# Altium PCB EdisonDecaAnchor_Redesign.PcbDoc (part 1 of 2)
Units mm, origin at the board's own origin, x right, y up, seen from the top; angles counter-clockwise.
Board outline 53.5 x 37.5 mm, 6 copper layers (Top Layer, Ground, Mid-Layer 2, Mid-Layer 3, Power, Bottom Layer), stack 1.141 mm thick; 153 components, 128 nets, 528 pads, 277 vias.
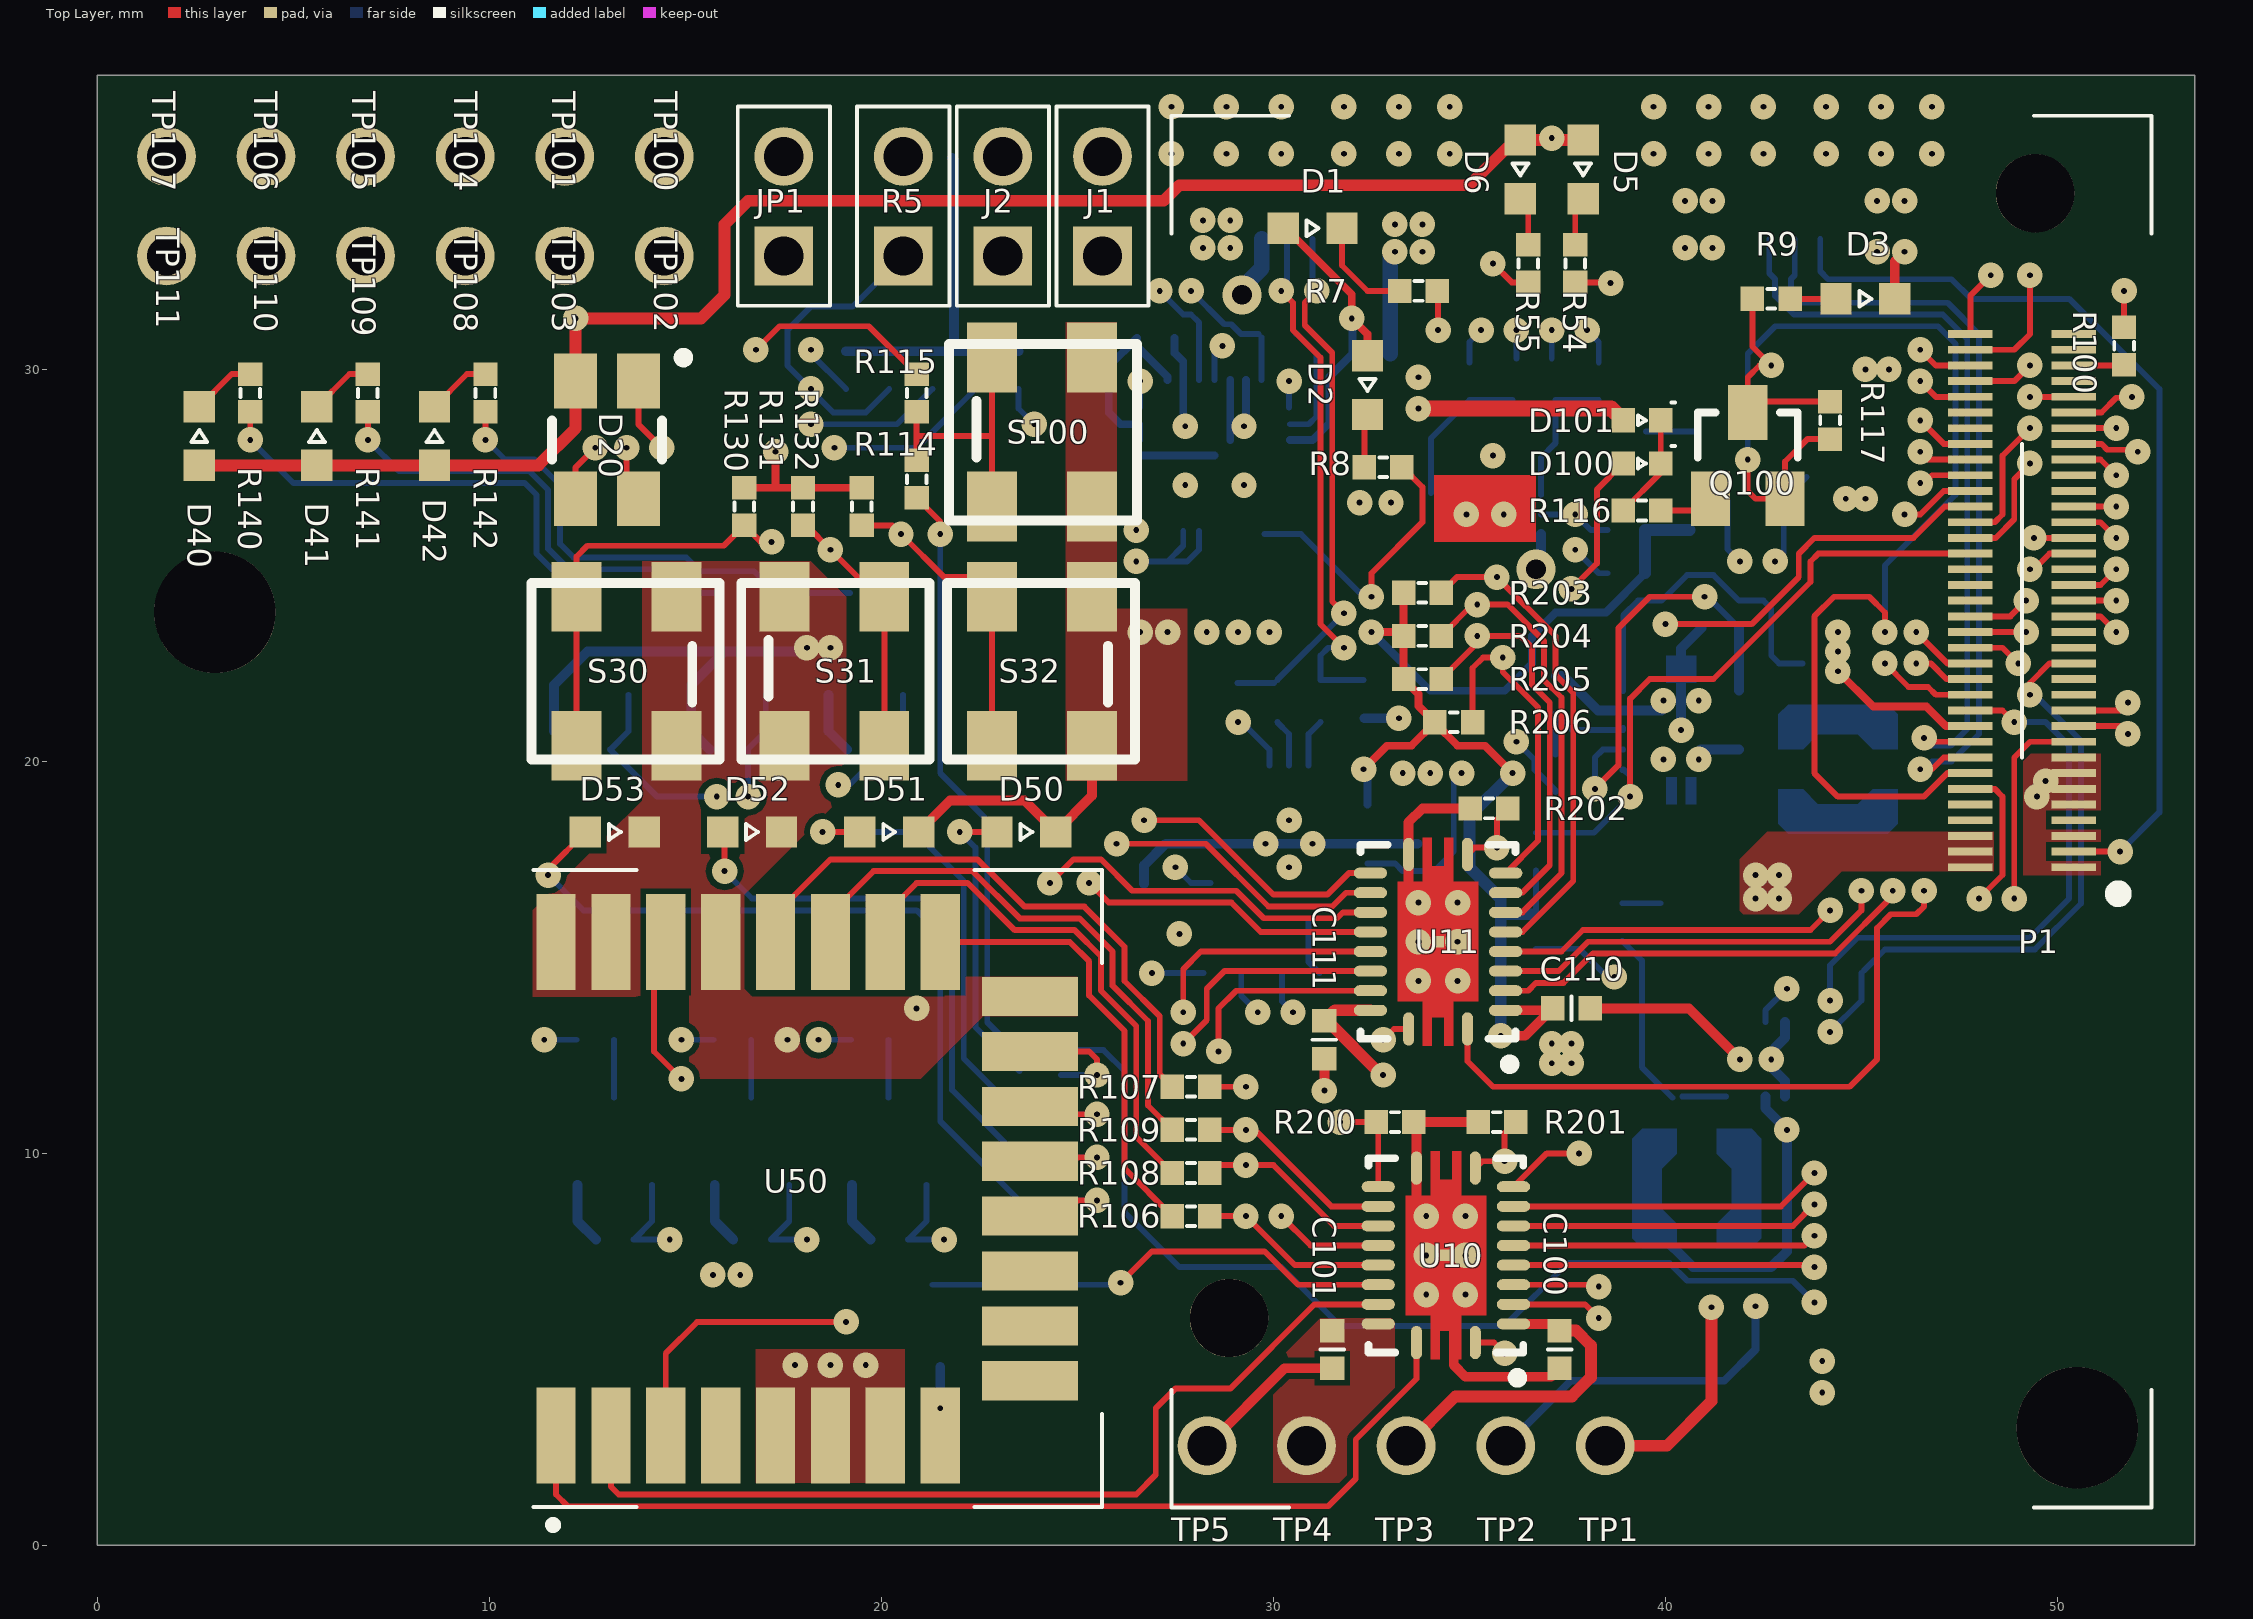
[diagram p0: Top Layer view]
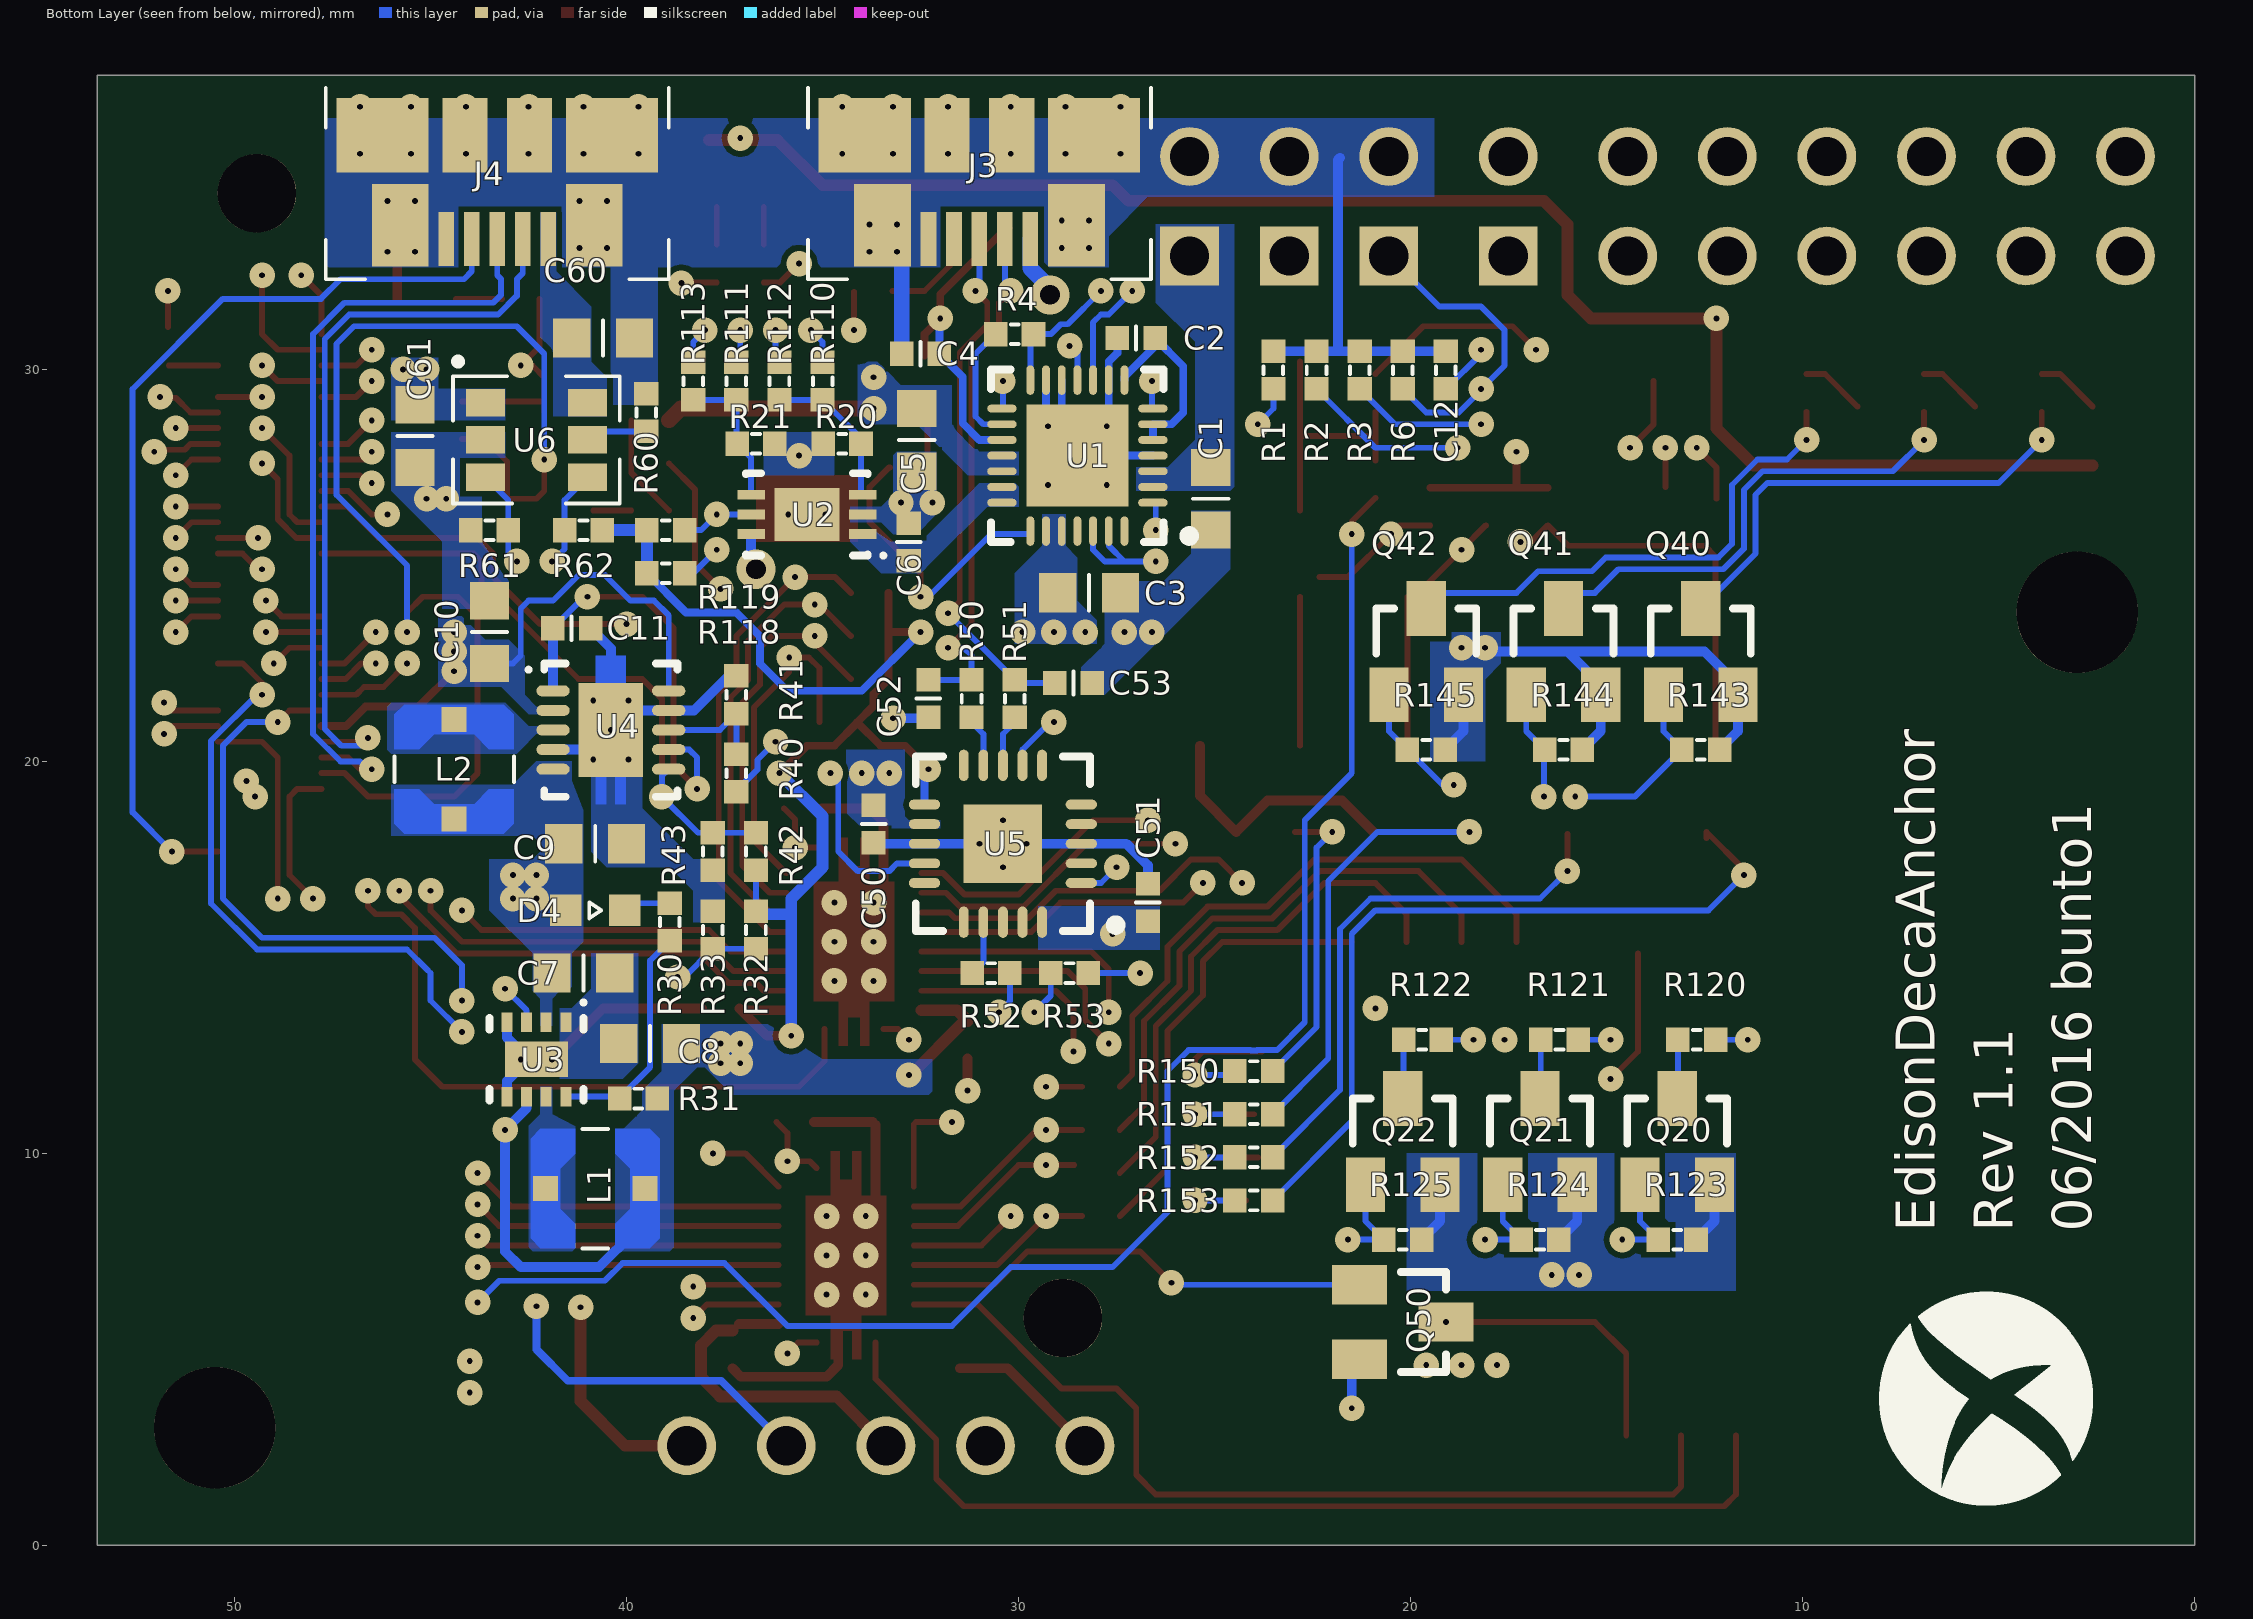
[diagram p1: Bottom Layer view, seen from below]
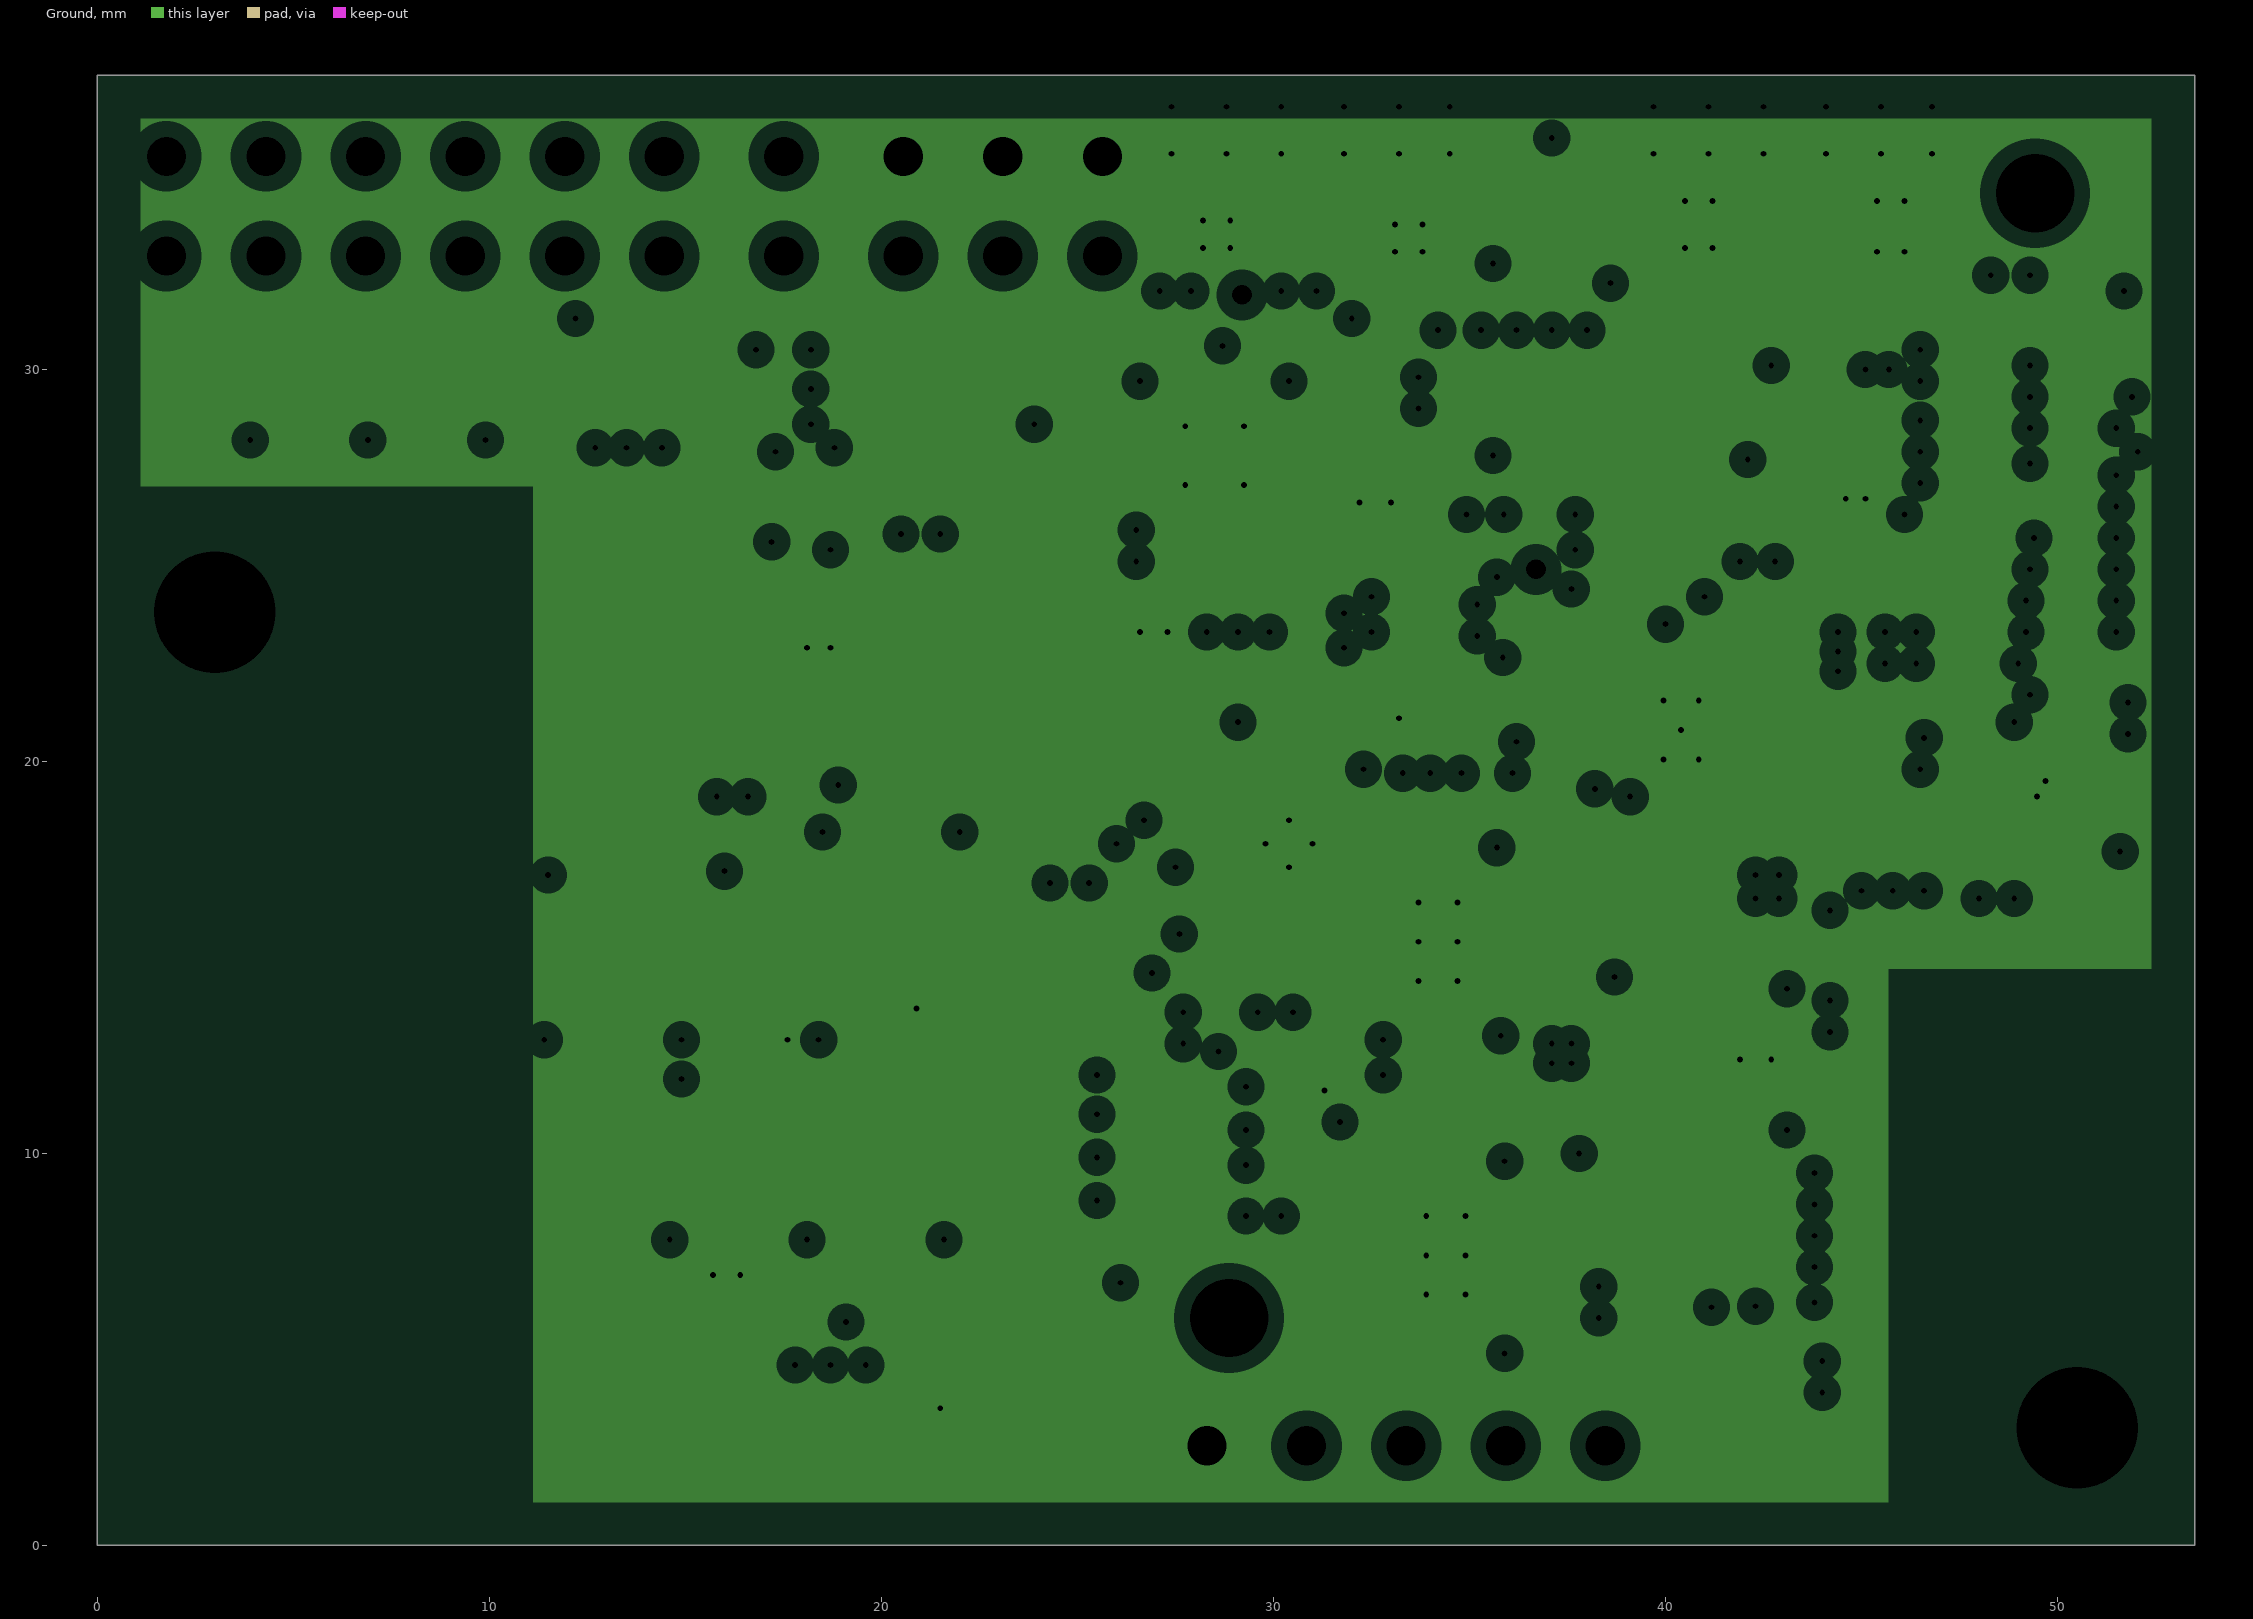
[diagram p2: Ground, clearances drawn from the general rule]
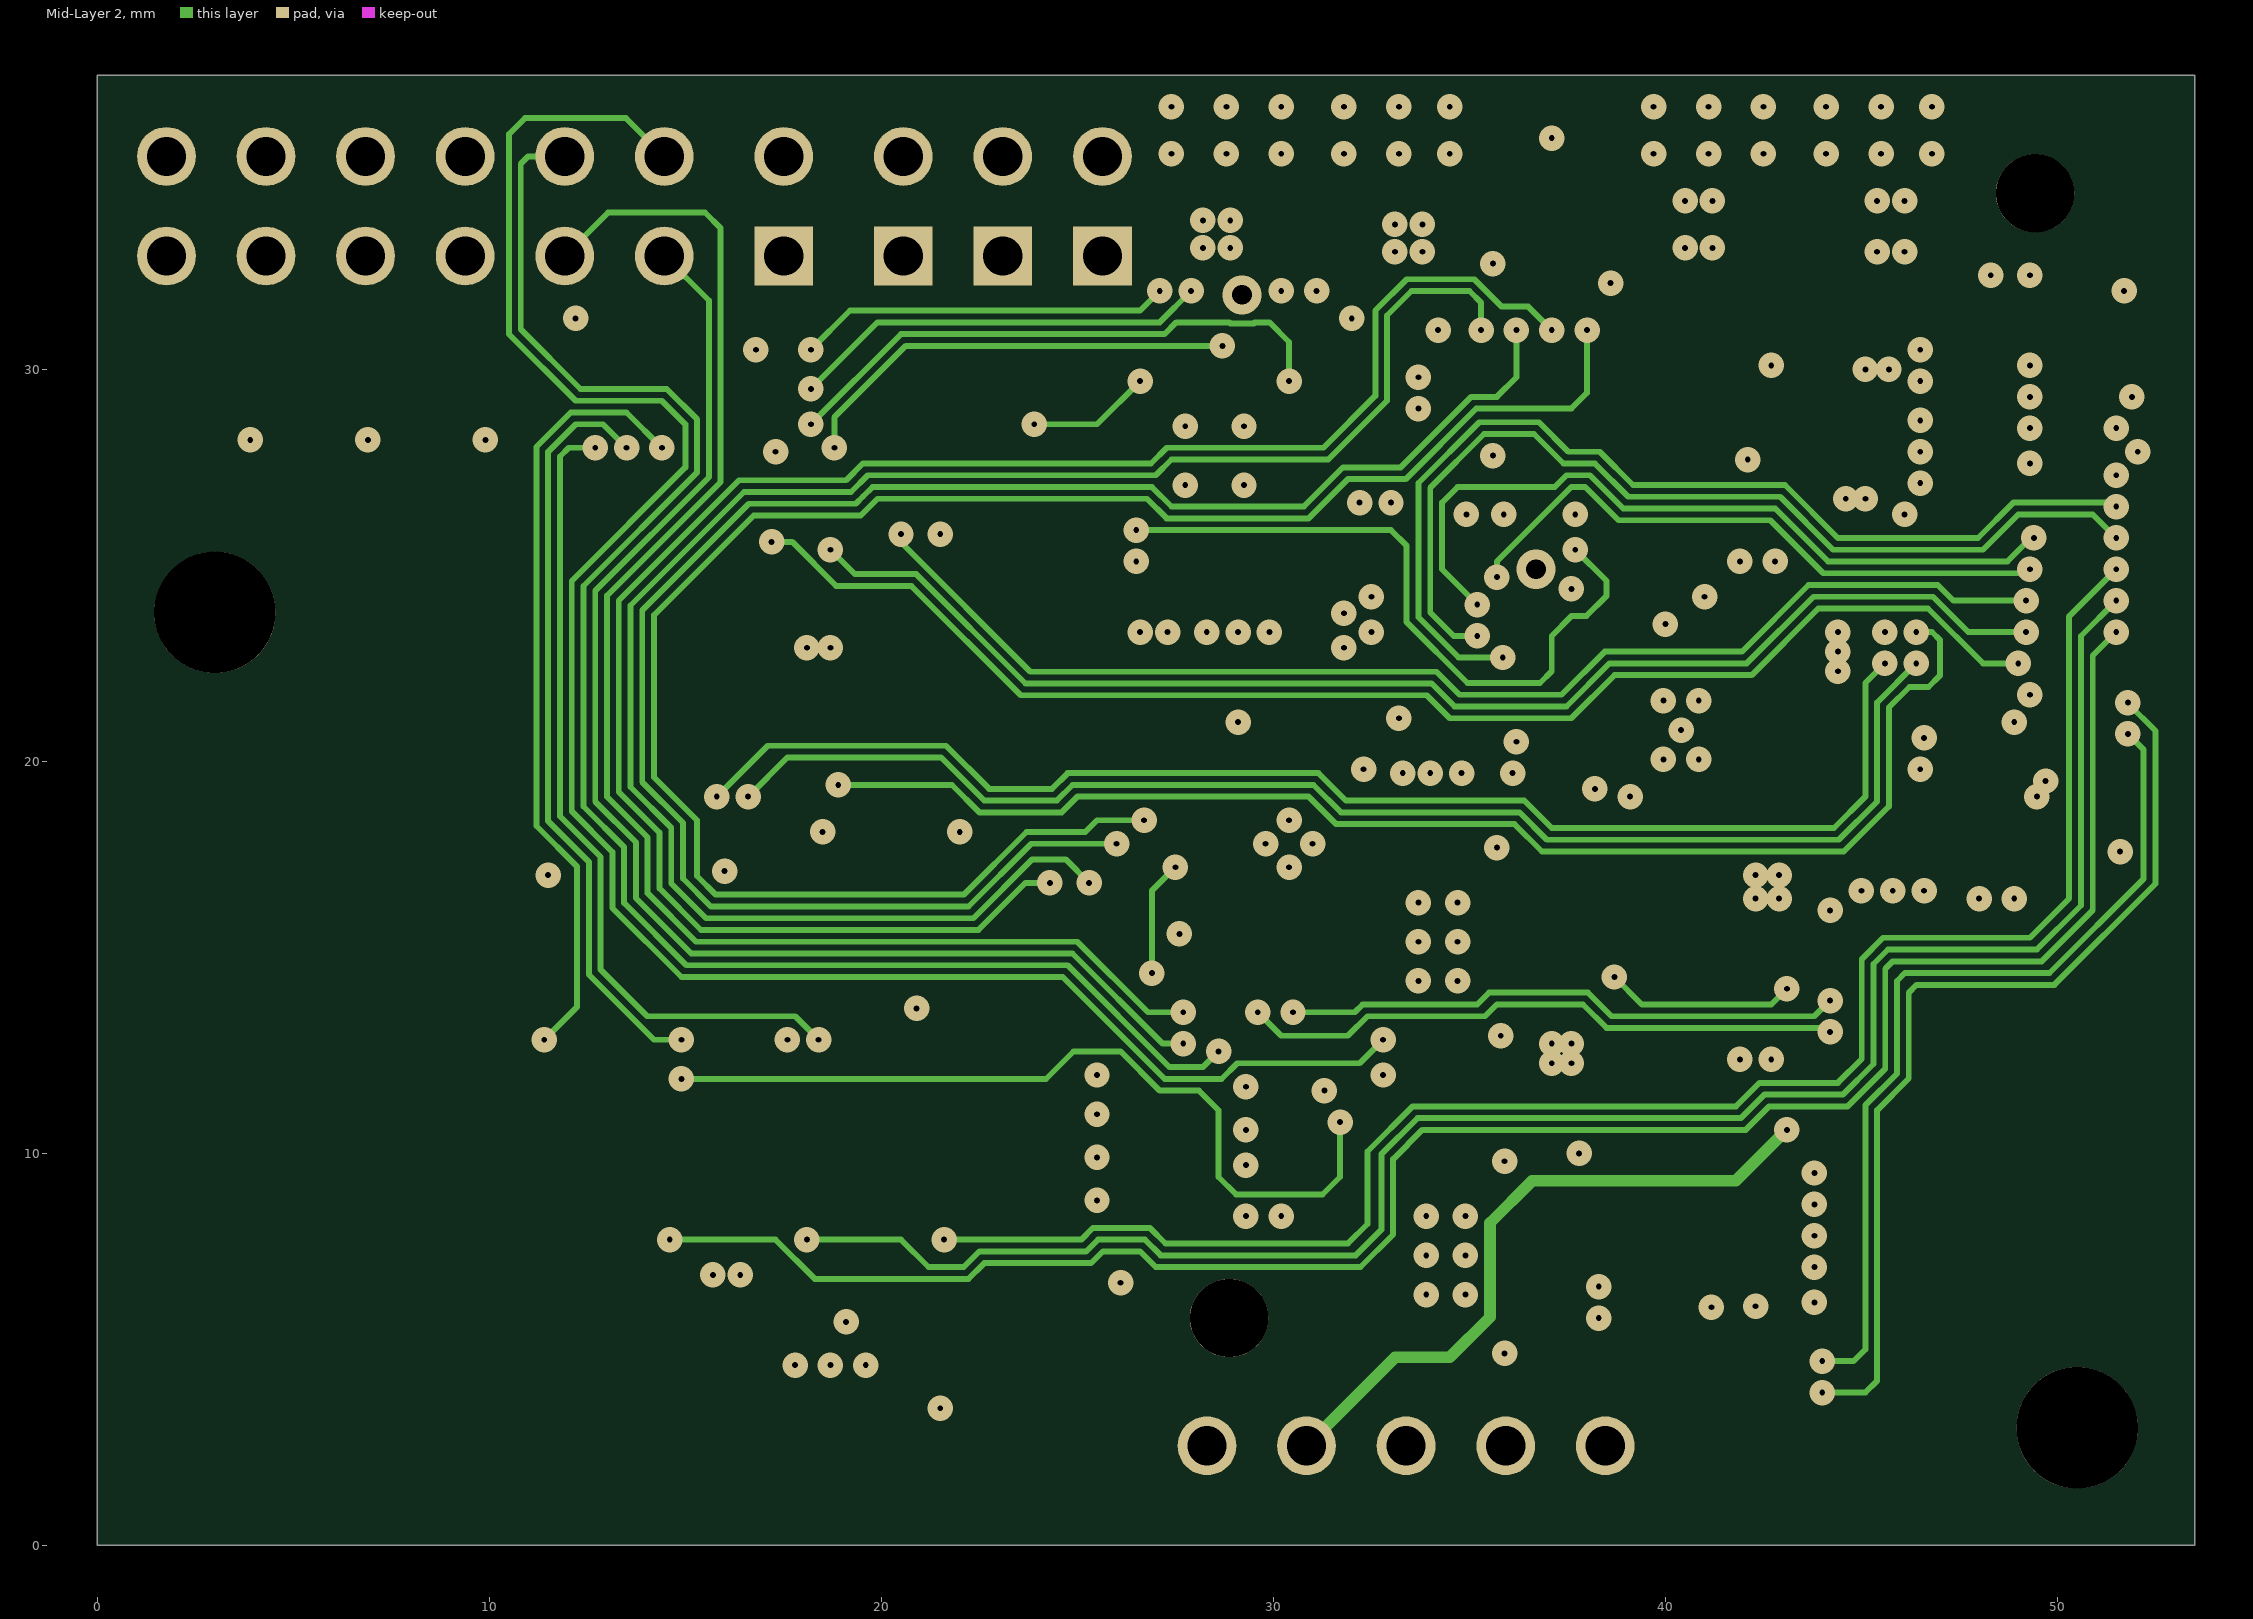
[diagram p3: Mid-Layer 2]
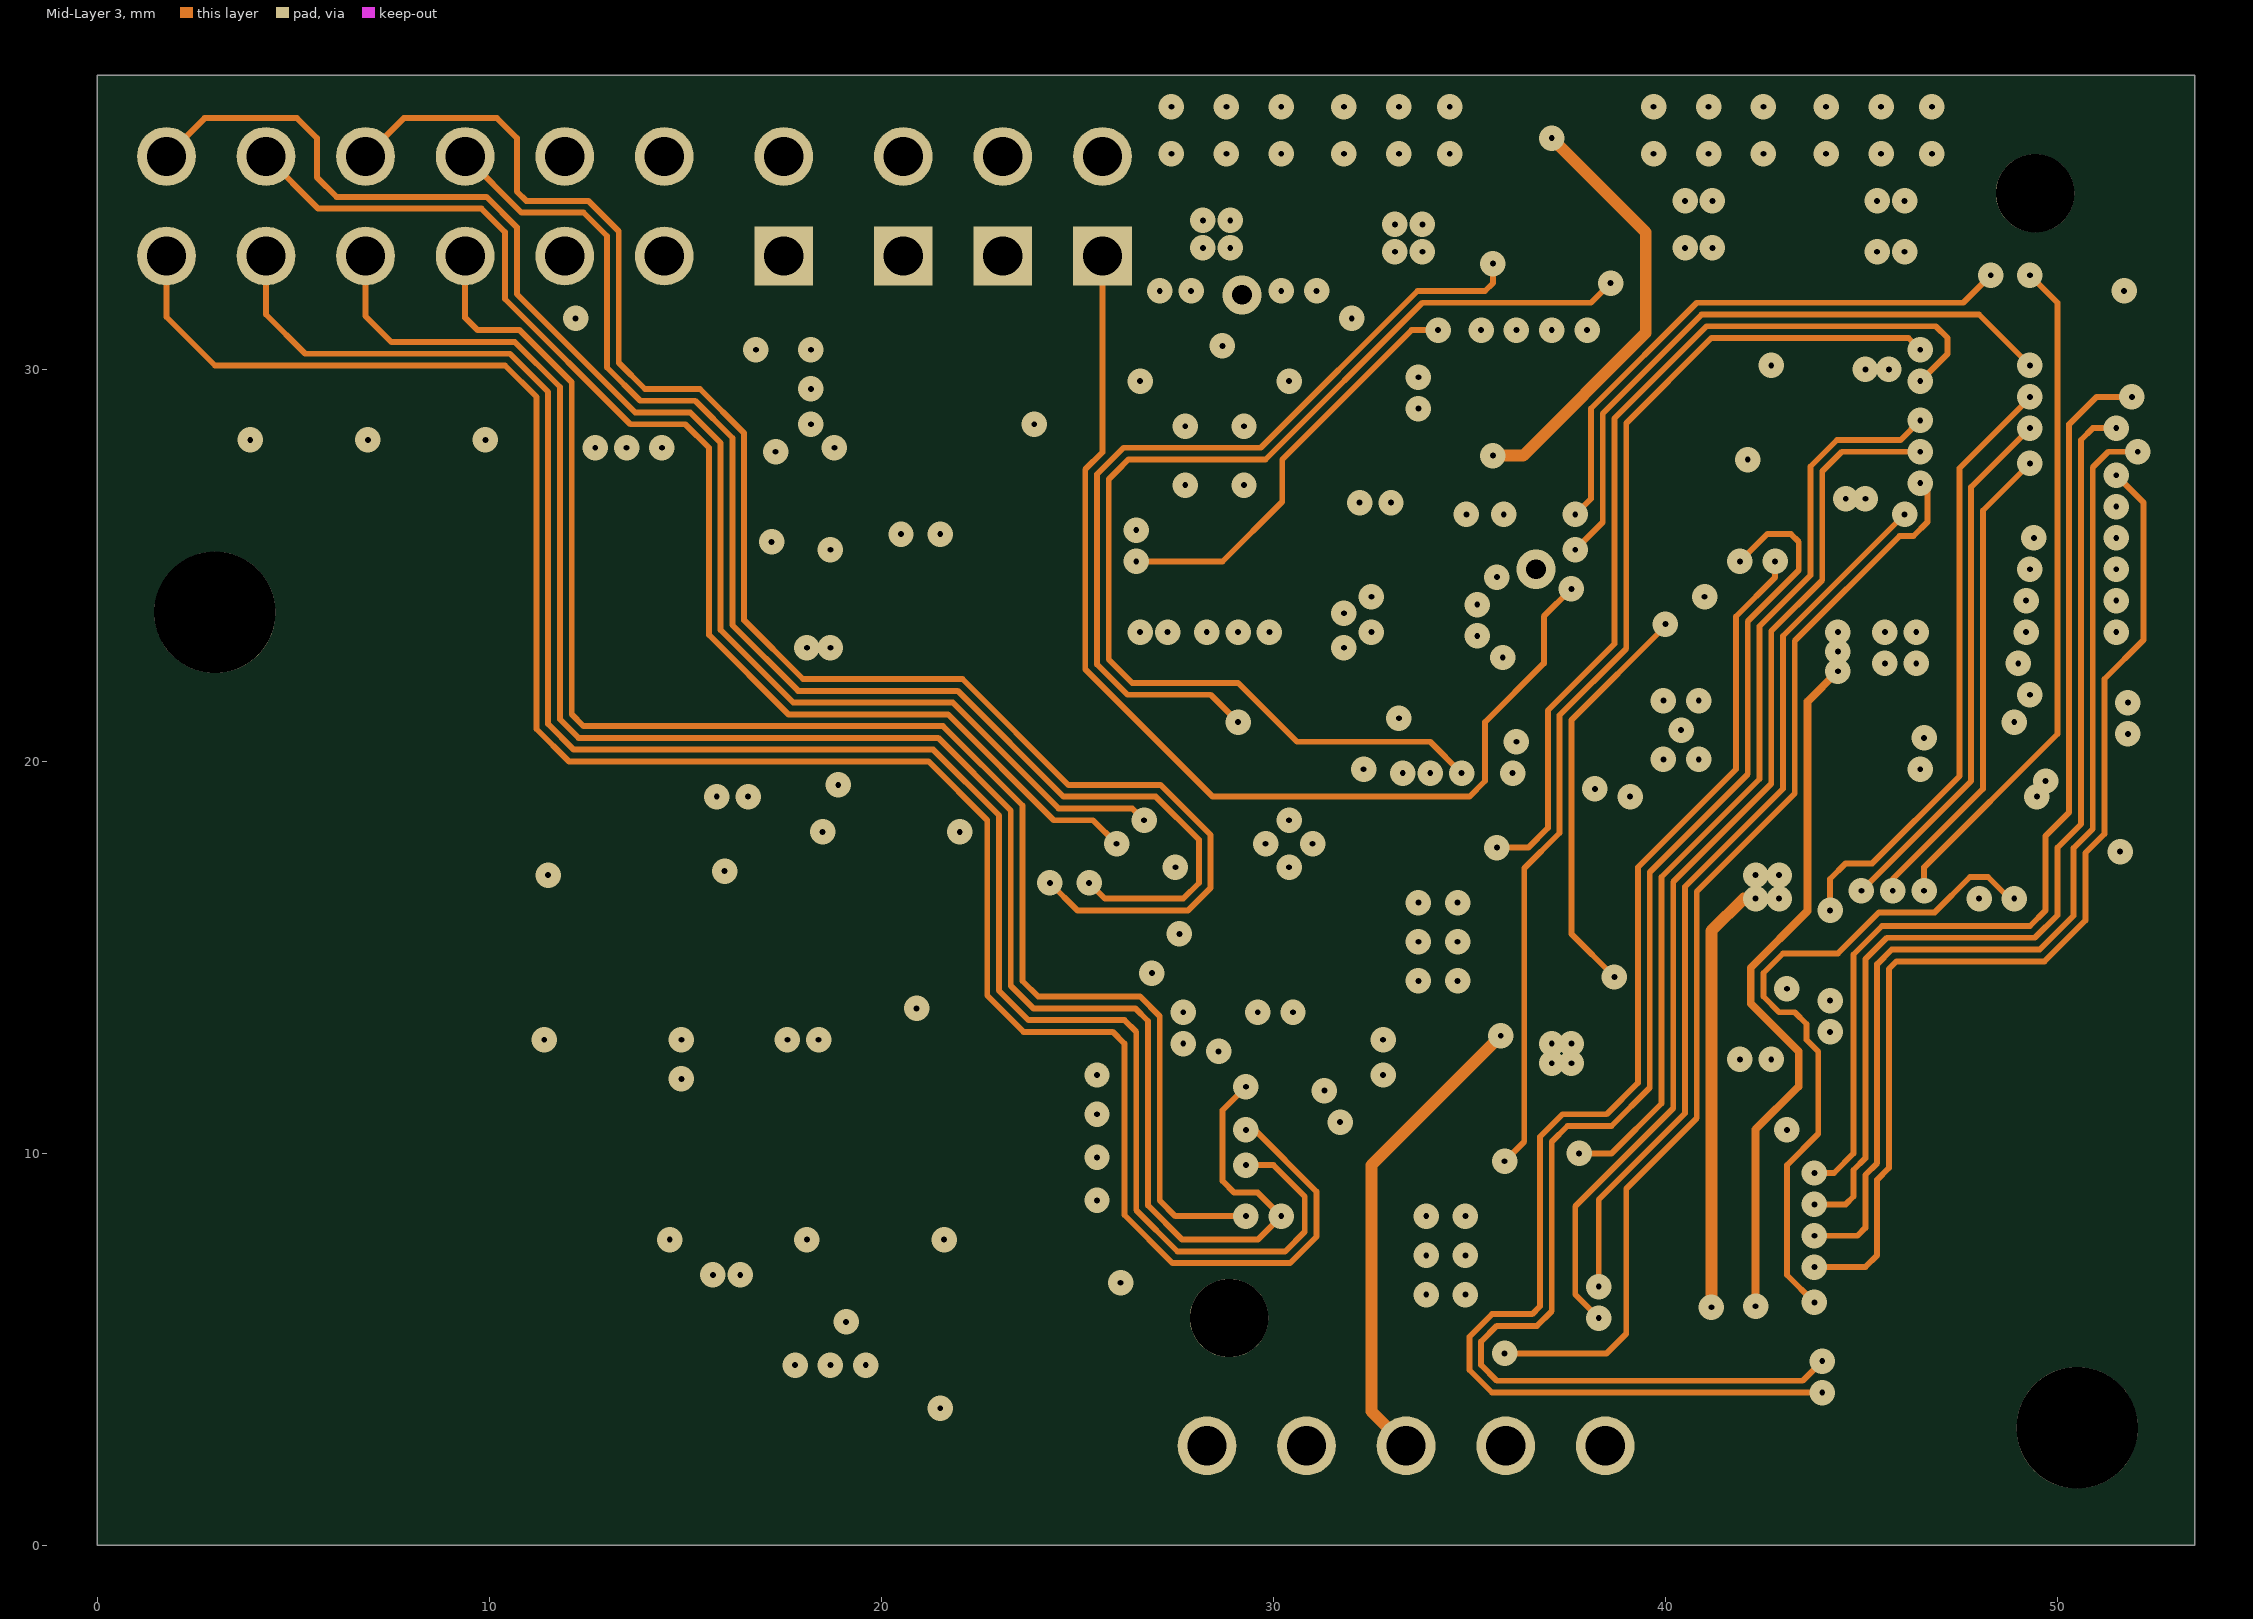
[diagram p4: Mid-Layer 3]
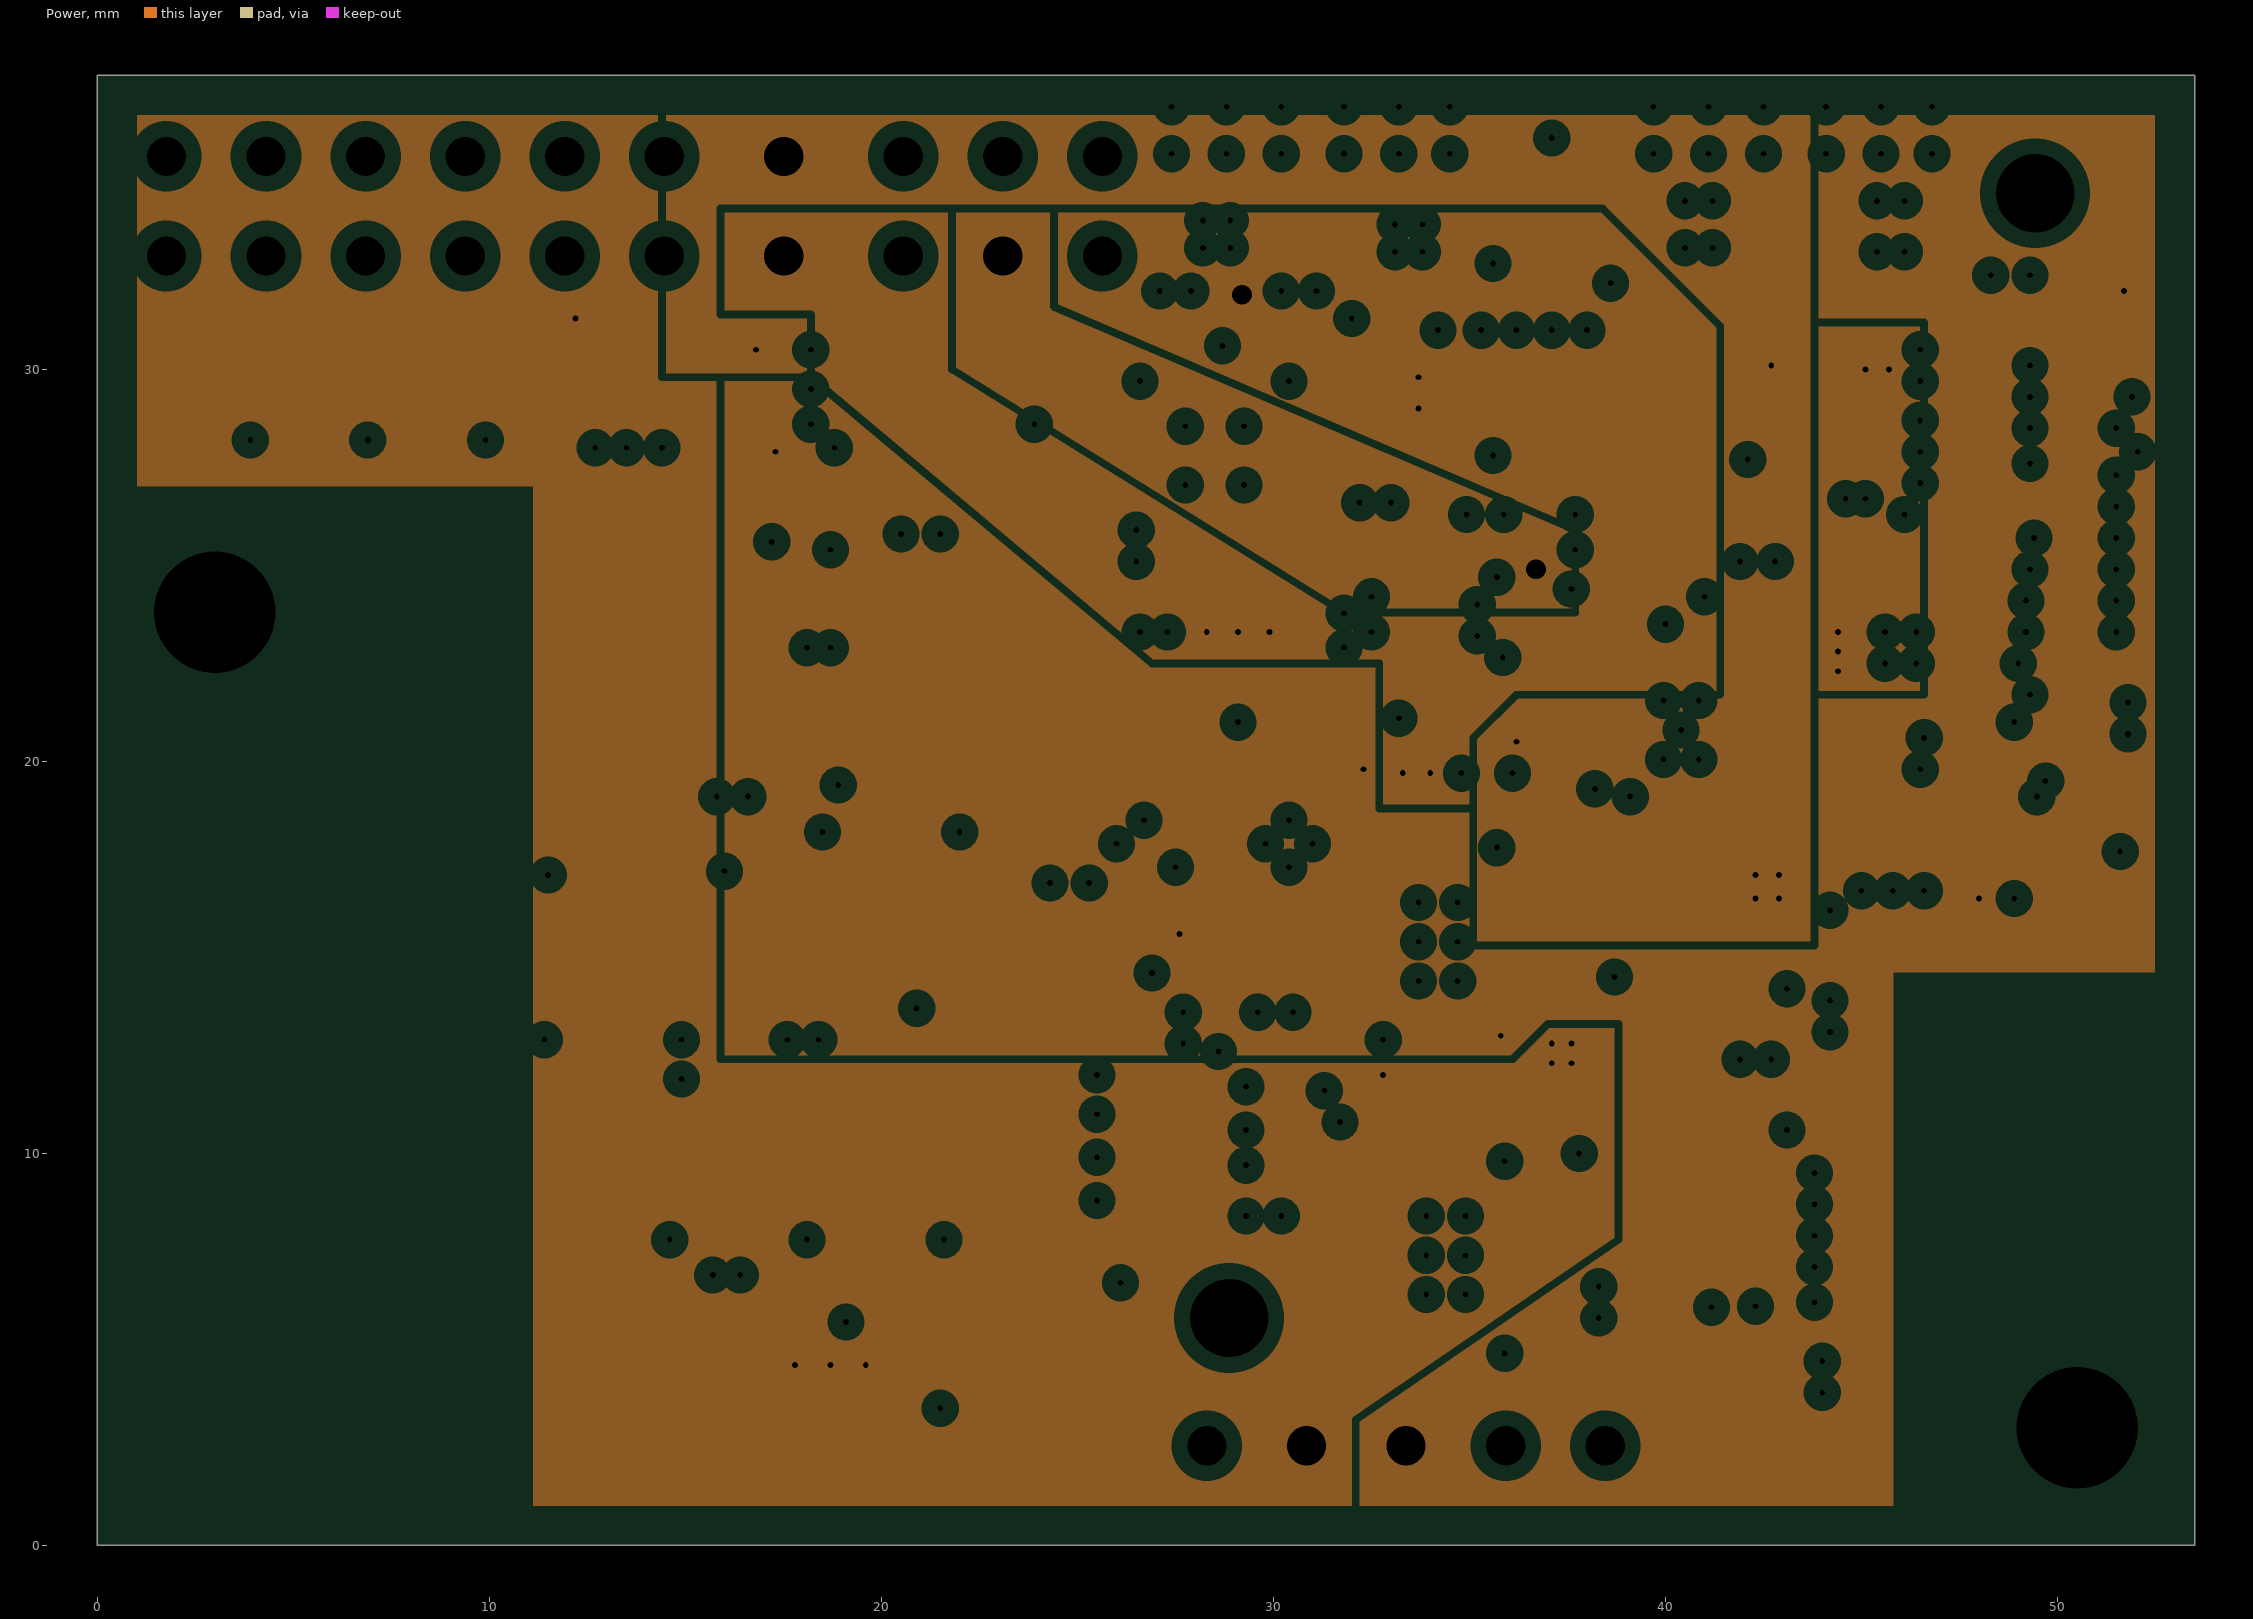
[diagram p5: Power, clearances drawn from the general rule]

## Layer stack, top to bottom
Top Solder: solder mask 0.0102, Solder Resist, Dk 3.5
Top Layer: signal copper 0.018
Dielectric1: prepreg 0.2, FR-4, Dk 4.8
Ground: plane copper 0.036, net GND
Dielectric2: core 0.254, FR-4, Dk 4.2
Mid-Layer 2: signal copper 0.0356
Dielectric3: prepreg 0.127, FR-4, Dk 4.2
Mid-Layer 3: signal copper 0.0356
Dielectric4: core 0.254, FR-4, Dk 4.2
Power: plane copper 0.036, net (Multiple Nets)
Dielectric5: prepreg 0.127, FR-4, Dk 4.2
Bottom Layer: signal copper 0.018
Bottom Solder: solder mask 0.0102, Solder Resist, Dk 3.5

## Board outline
0,0 0,37.5 53.5,37.5 53.5,0

## Design rules (kind name [scope] priority, off if disabled: settings)
AssemblyTestPointUsage [All] p1 off:
Clearance Clearance-xPP-xTP-xTT [All] p1: gap=0.15
ComponentClearance [All] p1: gap=0.25 collisioncheckmode=3 verticalgap=0.25 showdistances=FALSE
DiffPairsRouting [All] p1: maxlimit=0.25 minlimit=0.25 mostfreqgap=0.25 toplayer_minwidth=0.381 toplayer_maxwidth=0.381 toplayer_prefwidth=0.381 midlayer2_minwidth=0.381 midlayer2_maxwidth=0.381 midlayer2_prefwidth=0.381 midlayer3_minwidth=0.381 midlayer3_maxwidth=0.381 midlayer3_prefwidth=0.381 bottomlayer_minwidth=0.381 bottomlayer_maxwidth=0.381 bottomlayer_prefwidth=0.381 maxuncoupledlength=12.5
FabricationTestPointUsage [All] p1 off: valid=0 allowmultiple=FALSE
Height [All] p1: minheight=0 maxheight=25 prefheight=12.5
HoleSize HoleSize-PTH [All] p1: absolutevalues=TRUE maxlimit=2 minlimit=0.15 maxpercent=80.000 minpercent=20.000
HoleToHoleClearance [All] p1: gap=0.15 allowstackedmicrovias=TRUE
MinimumAnnularRing "Minimum IAR  <= 0.45mm" [((ObjectKind = 'Pad') OR (ObjectKind = 'Via')) And (Layer = 'MultiLayer') And (HoleDiameter <= AsMM(0.45))] p1: minimumring=0.25 // minimum inner annular ring for pads <= 0.45mm finished hole size
MinimumAnnularRing "Minimum IAR  > 0.45mm" [((ObjectKind = 'Pad') OR (ObjectKind = 'Via')) And (Layer = 'MultiLayer') And (HoleDiameter > AsMM(0.45))] p2: minimumring=0.25 // minimum inner annular ring for pads > 0.45mm finished hole size
MinimumAnnularRing Minimum-IAR [All] p3: minimumring=0.2
MinimumSolderMaskSliver [All] p1: minsoldermaskwidth=0.06
PlaneClearance PlaneClearance-IPI [All] p1: clearance=0.4
PlaneConnect [All] p1: planeconnectstyle=Direct reliefexpansion=0.4 reliefentries=4 reliefconductorwidth=0.4 reliefairgap=0.2
PolygonConnect PolygonConnect_Power [InNetClass('Power')] p1: connectstyle=Direct reliefconductorwidth=0.254 reliefentries=4 polygonreliefangle="90 Angle" airgapwidth=0.254
PolygonConnect PolygonConnect-xTW [All] p2: connectstyle=Relief reliefconductorwidth=0.2 reliefentries=4 polygonreliefangle="90 Angle" airgapwidth=0.254
RoutingCorners [All] p1: cornerstyle=45-Degree minsetback=2.5 maxsetback=2.5
RoutingVias "RoutingVias <= 0.45mm" [(ObjectKind = 'Via') And (HoleDiameter <= AsMM(0.45))] p1: holewidth=0.2 width=0.6 viastyle="Through Hole" minholewidth=0.15 minwidth=0.55 maxholewidth=0.3 maxwidth=0.7
RoutingVias "RoutingVias > 0.45mm" [(ObjectKind = 'Via') And (HoleDiameter > AsMM(0.45))] p2: holewidth=0.5 width=0.95 viastyle="Through Hole" minholewidth=0.45 minwidth=0.9 maxholewidth=0.9 maxwidth=1.35
SilkToSilkClearance [All] p1 off: silktosilkclearance=0.2
SilkToSolderMaskClearance SilkscreenOverComponentPads [IsPad] p1 off: minsilkscreentomaskgap=0.2 clearancetoexposedcopper=TRUE
SolderMaskExpansion [All] p1: expansion=0.06
Width Width-xTW [All] p1: maxlimit=1.5 minlimit=0.15 preferedwidth=0.2
17 further rules are at their usual default settings.

## Classes and differential pairs
component class AnchorBoard_SNS_Power: C1 C2 C3 C4 C5 C6 C7 C8 C9 C10 C11 C12 C50 C51 C52 C53 C60 C61 D1 D2 D3 D4 D5 D6 J1 J2 J3 J4 JP1 L1 L2 R1 R2 R3 R4 R5 R6 R7 R8 R9 R20 R21 R30 R31 R32 R33 R40 R41 R42 R43 R50 R51 R52 R53 R54 R55 R60 R61 R62 TP1 TP2 TP3 TP4 TP5 U1 U2 U3 U4 U5 U6
component class AnchorBoard_SNS_Edison: C100 C101 C110 C111 D20 D40 D41 D42 D50 D51 D52 D53 D100 D101 P1 Q20 Q21 Q22 Q40 Q41 Q42 Q50 Q100 R100 R106 R107 R108 R109 R110 R111 R112 R113 R114 R115 R116 R117 R118 R119 R120 R121 R122 R123 R124 R125 R130 R131 R132 R140 R141 R142 R143 R144 R145 R150 R151 R152 R153 R200 R201 R202 R203 R204 R205 R206 S30 S31 S32 S100 TP100 TP101 TP102 TP103 TP104 TP105 TP106 TP107 TP108 TP109 TP110 TP111 U10 U11 U50
net class Power: 1V8 3V3 5V GND NetC2_2 NetC3_2 NetC11_2 NetC60_2 NetJ2_1 NetL1_1 NetL2_2 V_BATT V_CHG_USB V_DCIN V_LDO VSYS

## Components (designator, comment, footprint, x,y, rotation, side; value= is the part's Value field where it differs from the comment)
C1 "10uF" CAPC1608X80 25.1,26.7 r90 bottom
C2 "100nF" CAPC1005X50 27,30.8 r180 bottom
C3 "10uF" CAPC1608X80 28.2,24.3 r0 bottom
C4 "1uF" CAPC1005X50 32.5,30.4 r180 bottom
C5 "4.7uF" CAPC1608X80 32.6,28.2 r90 bottom
C6 "100nF" CAPC1005X50 32.8,25.6 r270 bottom
C7 "10uF" CAPC1608X80 41.1,14.6 r0 bottom
C8 "22uF" CAPC1608X80 39.4,12.8 r180 bottom
C9 "10uF" CAPC1608X80 40.8,17.9 r0 bottom
C10 "22uF" CAPC1608X80 43.5,23.3 r270 bottom
C11 "1uF" CAPC1005X50 41.4,23.4 r0 bottom
C12 "NCC" RESC1005X35 19.1,29.98 r270 bottom
C50 "100nF" CAPC1005X50 33.7,18.4 r90 bottom
C51 "100nF" CAPC1005X50 26.7,16.4 r270 bottom
C52 "47pF" CAPC1005X50 32.3,21.6 r90 bottom
C53 "47pF" CAPC1005X50 28.6,22 r0 bottom
C60 "10uF" CAPC1608X80 40.6,30.8 r0 bottom
C61 "10uF" CAPC1608X80 45.4,28.3 r90 bottom
C100 "100nF" CAPC1005X50 37.3,5 r90 top
C101 "100nF" CAPC1005X50 31.5,5 r90 top
C110 "100nF" CAPC1005X50 37.6,13.7 r180 top
C111 "100nF" CAPC1005X50 31.3,12.9 r90 top
D1 "green" LEDM1608X80 31,33.6 r0 top
D2 "red" LEDM1608X80 32.4,29.6 r270 top
D3 "blue" LEDM1608X80 45.1,31.8 r0 top
D4 "red" LEDM1608X80 40.8,16.2 r180 bottom
D5 "yellow" LEDM1608X80 37.9,35.1 r270 top
D6 "orange" LEDM1608X80 36.3,35.1 r270 top
D20 "RGB LED" PLCC160P350X280X190-4 13,28.2 r270 top
D40 "green" LEDM1608X80 2.6,28.3 r90 top
D41 "orange" LEDM1608X80 5.6,28.3 r90 top
D42 "red" LEDM1608X80 8.6,28.3 r90 top
D50 "green" LEDM1608X80 23.7,18.2 r0 top
D51 "red" LEDM1608X80 20.2,18.2 r0 top
D52 "yellow" LEDM1608X80 16.7,18.2 r0 top
D53 "orange" LEDM1608X80 13.2,18.2 r0 top
D100 "DB2G42900L1" DIOC1006X10 39.4,27.6 r180 top
D101 "DB2G42900L1" DIOC1006X10 39.4,28.7 r180 top
J1 "DC In" HDR1X2_V_M 25.638,32.893 r90 top
J2 "Accu" HDR1X2_V_M 23.098,32.893 r90 top
J3 "USB Charge / UART" MOLEX_0473460001 31,36.3 r270 bottom
J4 "Edison USB OTG Port" MOLEX_0473460001 43.3,36.3 r270 bottom
JP1 "JUMPER" HDR1X2_V_M 17.51,32.893 r90 top
L1 "2.2uH" INDM2929X140 40.8,9.1 r180 bottom
L2 "2.2uH" INDM2929X140 44.4,19.8 r90 bottom
P1 "Intel Edison" HDRV70W12P40_2X35_Edison 49.1,24.1 r0 top
Q20 "FDV301N" SOT190P360X120-3 13.2,10.3 r180 bottom
Q21 "FDV301N" SOT190P360X120-3 16.7,10.3 r180 bottom
Q22 "FDV301N" SOT190P360X120-3 20.201,10.299 r180 bottom
Q40 "FDV301N" SOT190P360X120-3 12.6,22.8 r180 bottom
Q41 "FDV301N" SOT190P360X120-3 16.1,22.8 r180 bottom
Q42 "FDV301N" SOT190P360X120-3 19.6,22.8 r180 bottom
Q50 "FDV301N" SOT190P360X120-3 20.2,5.7 r270 bottom
Q100 "FDV301N" SOT190P360X120-3 42.1,27.8 r0 top
R1 "1K5" RESC1005X35 23.5,29.98 r90 bottom
R2 "3K" RESC1005X35 22.4,29.98 r90 bottom
R3 "0R" RESC1005X35 21.3,29.98 r270 bottom
R4 "10K" RESC1005X35 30.1,30.9 r0 bottom
R5 "NTC" HDR1X2_V_M 20.558,32.893 r90 top
R6 "NC" RESC1005X35 20.2,29.98 r90 bottom
R7 "68R" RESC1005X35 33.7,32 r0 top
R8 "82R" RESC1005X35 32.8,27.5 r180 top
R9 "68R" RESC1005X35 42.7,31.8 r0 top
R20 "10K" RESC1005X35 34.5,28.1 r180 bottom
R21 "10K" RESC1005X35 36.7,28.1 r0 bottom
R30 "220R" RESC1005X35 38.9,15.9 r270 bottom
R31 "100K" RESC1005X35 39.7,11.4 r180 bottom
R32 "NC" RESC1005X35 36.7,15.7 r90 bottom
R33 "20K" RESC1005X35 37.8,15.7 r90 bottom
R40 "NC" RESC1005X35 37.2,19.7 r270 bottom
R41 "0R" RESC1005X35 37.2,21.7 r270 bottom
R42 "NC" RESC1005X35 36.7,17.7 r270 bottom
R43 "20K" RESC1005X35 37.8,17.7 r270 bottom
R50 "27R" RESC1005X35 31.2,21.6 r270 bottom
R51 "27R" RESC1005X35 30.1,21.6 r270 bottom
R52 "100R" RESC1005X35 30.7,14.6 r0 bottom
R53 "100R" RESC1005X35 28.7,14.6 r180 bottom
R54 "68R" RESC1005X35 37.7,32.7 r270 top
R55 "68R" RESC1005X35 36.5,32.7 r90 top
R60 "287R" RESC1005X35 39.5,28.9 r90 bottom
R61 "100K" RESC1005X35 43.5,25.9 r0 bottom
R62 "20K" RESC1005X35 41.1,25.9 r0 bottom
R100 "0R" RESC1005X35 51.7,30.6 r90 top
R106 "0R" RESC1005X35 27.9,8.4 r180 top
R107 "0R" RESC1005X35 27.9,11.7 r180 top
R108 "0R" RESC1005X35 27.9,9.5 r180 top
R109 "0R" RESC1005X35 27.9,10.6 r180 top
R110 "0R" RESC1005X35 35,29.7 r270 bottom
R111 "0R" RESC1005X35 37.2,29.7 r270 bottom
R112 "NC" RESC1005X35 36.1,29.7 r270 bottom
R113 "NC" RESC1005X35 38.3,29.7 r270 bottom
R114 "220R" RESC1005X35 20.9,27.2 r90 top
R115 "20K" RESC1005X35 20.9,29.4 r270 top
R116 "1K" RESC1005X35 39.4,26.4 r0 top
R117 "NC" RESC1005X35 44.2,28.7 r90 top
R118 "20K" RESC1005X35 39,24.8 r180 bottom
R119 "20K" RESC1005X35 39,25.9 r180 bottom
R120 "68R" RESC1005X35 12.7,12.9 r180 bottom
R121 "27R" RESC1005X35 16.2,12.9 r180 bottom
R122 "27R" RESC1005X35 19.7,12.9 r180 bottom
R123 "20K" RESC1005X35 13.2,7.8 r180 bottom
R124 "20K" RESC1005X35 16.7,7.8 r180 bottom
R125 "20K" RESC1005X35 20.2,7.8 r180 bottom
R130 "20K" RESC1005X35 16.5,26.5 r270 top
R131 "20K" RESC1005X35 18,26.5 r270 top
R132 "20K" RESC1005X35 19.5,26.5 r270 top
R140 "68R" RESC1005X35 3.9,29.4 r270 top
R141 "68R" RESC1005X35 6.9,29.4 r270 top
R142 "82R" RESC1005X35 9.9,29.4 r270 top
R143 "20K" RESC1005X35 12.6,20.3 r180 bottom
R144 "20K" RESC1005X35 16.1,20.3 r180 bottom
R145 "20K" RESC1005X35 19.6,20.3 r180 bottom
R150 "68R" RESC1005X35 24,12.1 r180 bottom
R151 "82R" RESC1005X35 24,11 r180 bottom
R152 "68R" RESC1005X35 24,9.9 r180 bottom
R153 "68R" RESC1005X35 24,8.8 r180 bottom
R200 "20K" RESC1005X35 33.1,10.8 r0 top
R201 "100K" RESC1005X35 35.7,10.8 r180 top
R202 "100K" RESC1005X35 35.5,18.8 r180 top
R203 "2K" RESC1005X35 33.8,24.3 r0 top
R204 "2K" RESC1005X35 33.8,23.2 r0 top
R205 "2K" RESC1005X35 33.8,22.1 r0 top
R206 "2K" RESC1005X35 34.6,21 r0 top
S30 "SW_SPST_PB" SW_7914J-1-000E 13.5,22.3 r180 top
S31 "SW_SPST_PB" SW_7914J-1-000E 18.8,22.3 r0 top
S32 "SW_SPST_PB" SW_7914J-1-000E 24.1,22.3 r180 top
S100 "SW_SPST_PB" SW_7914J-1-000E 24.1,28.4 r0 top
TP1 "V_SYS" TP_THT 38.465,2.54 r0 top
TP2 "V_5V" TP_THT 35.925,2.54 r90 top
TP3 "V_1V8" TP_THT 33.385,2.54 r90 top
TP4 "V_3V3" TP_THT 30.845,2.54 r90 top
TP5 "GND" TP_THT 28.305,2.54 r90 top
TP100 "GPIO_0" TP_THT 14.462,35.433 r90 top
TP101 "GPIO_1" TP_THT 11.922,35.433 r90 top
TP102 "USART_RX" TP_THT 14.462,32.893 r90 top
TP103 "USART_TX" TP_THT 11.922,32.893 r90 top
TP104 "I2C1_SCL" TP_THT 9.382,35.433 r90 top
TP105 "I2C1_SDA" TP_THT 6.842,35.433 r90 top
TP106 "I2C6_SCL" TP_THT 4.302,35.433 r90 top
TP107 "I2C6_SDA" TP_THT 1.762,35.433 r90 top
TP108 "SPI_CS" TP_THT 9.382,32.893 r90 top
TP109 "SPI_SCK" TP_THT 6.842,32.893 r90 top
TP110 "SPI_MOSI" TP_THT 4.302,32.893 r90 top
TP111 "SPI_MISO" TP_THT 1.762,32.893 r90 top
U1 "MAX8934E" QFN40P40X40X80-29 28.5,27.8 r0 bottom
U2 "LTC2941-1" DFN30X20X80-6 35.4,26.3 r0 bottom
U3 "TPS62162" SON50P210X210X80-9 42.3,12.4 r270 bottom
U4 "TPS61202" SON50P310X310X100-11 40.4,20.8 r180 bottom
U5 "FT231XQ" QFN50P40X40X80-21 30.4,17.9 r0 bottom
U6 "MIC2039EYM6-TR" SOT95P360X130-6 42.3,28.2 r270 bottom
U10 "TXS0108E" QFN50P47X37X100-21 34.4,7.4 r180 top
U11 "TXS0108E" QFN50P47X37X100-21 34.2,15.4 r180 top
U50 "DWM1000" DECAWAVE_DWM1000 12.5,9.1 r90 top

## Footprints (in the part's own frame and the unit in brackets; to place one, negate y for a bottom-side part, rotate by r counter-clockwise, add the part's x,y. Pads: shape width x height; smd on the part's side, far side on the other; paste and mask are expansions set on the pad)
CAPC1005X50 [mm] "Chip Capacitor; 1.0x0.5mm"
  rect 0.6x0.62 smd: 1(-0.48,0) 2(0.48,0)
  silkscreen extent 0,-0.3 0,0.3, body extent -0.5,-0.25 0.5,0.25, height 0.35
CAPC1608X80 [mm] "Chip Capacitor; 1.6x0.8mm"
  rect 0.95x1 smd: 1(-0.8,0) 2(0.8,0)
  silkscreen extent 0,-0.45 0,0.45, body extent -0.8,-0.4 0.8,0.4, height 0.8
DECAWAVE_DWM1000 [mm] "DecaWave DWM1000 module"
  rect 2.45x1 smd: 1(-6.295,0.8) 2(-6.295,-0.6) 3(-6.295,-2) 4(-6.295,-3.4) 5(-6.295,-4.8) 6(-6.295,-6.2) 7(-6.295,-7.6) 8(-6.295,-9) 17(6.295,-9) 18(6.295,-7.6) 19(6.295,-6.2) 20(6.295,-4.8) 21(6.295,-3.4) 22(6.295,-2) 23(6.295,-0.6) 24(6.295,0.8)
  rect 1x2.45 smd: 9(-4.9,-11.295) 10(-3.5,-11.295) 11(-2.1,-11.295) 12(-0.7,-11.295) 13(0.7,-11.295) 14(2.1,-11.295) 15(3.5,-11.295) 16(4.9,-11.295)
  silkscreen extent -8.66,-13.13 8.13,1.38, body extent -6.5,-11.47 6.5,11.53, height 2.9
DFN30X20X80-6 [mm] "LTC2941-1"
  rect 0.7x0.25 smd mask+0.08: 1(-1.425,0.5) 2(-1.425,0) 3(-1.425,-0.5) 4(1.425,-0.5) 5(1.425,0) 6(1.425,0.5)
  rect 1.65x1.35 smd paste-0.2 mask+0.102: 7(0,0)
  silkscreen extent -2,-1.05 1.55,1.1, body extent -1.5,-1 1.5,1, height 0.8
DIOC1006X10 [mm] "Chip Diode 1x0.6mm"
  rect 0.6x0.62 smd: 1(-0.48,0) 2(0.48,0)
  silkscreen extent -0.85,-0.45 0.1,0.13, body extent -0.5,-0.25 0.5,0.25, height 0.35
HDR1X2_V_M [mm] "Connector; Header; 2 Position male"
  rect 1.5x1.5 hole 1: 1(0,0)
  round 1.5 hole 1: 2(2.54,0)
  silkscreen extent -1.27,-1.17 3.81,1.17, body extent -1.3,-1.3 3.8,1.3, height 8.3
HDRV70W12P40_2X35_Edison [mm] "Header for Intel Edison"
  round 2 hole 2 paste+0 mask+0: 0(-20.23,-18.3) 0(0.33,10.39)
  rect 1.14x0.2 smd paste-0.05 mask+0.02: 1(1.32,-6.8) 2(-1.32,-6.8) 3(1.32,-6.4) 4(-1.32,-6.4) 5(1.32,-6) 6(-1.32,-6) 7(1.32,-5.6) 8(-1.32,-5.6) 9(1.32,-5.2) 10(-1.32,-5.2) 11(1.32,-4.8) 12(-1.32,-4.8) 13(1.32,-4.4) 14(-1.32,-4.4) 15(1.32,-4) 16(-1.32,-4) 17(1.32,-3.6) 18(-1.32,-3.6) 19(1.32,-3.2) 20(-1.32,-3.2) 21(1.32,-2.8) 22(-1.32,-2.8) 23(1.32,-2.4) 24(-1.32,-2.4) 25(1.32,-2) 26(-1.32,-2) 27(1.32,-1.6) 28(-1.32,-1.6) 29(1.32,-1.2) 30(-1.32,-1.2) 31(1.32,-0.8) 32(-1.32,-0.8) 33(1.32,-0.4) 34(-1.32,-0.4) 35(1.32,0) 36(-1.32,0) 37(1.32,0.4) 38(-1.32,0.4) 39(1.32,0.8) 40(-1.32,0.8) 41(1.32,1.2) 42(-1.32,1.2) 43(1.32,1.6) 44(-1.32,1.6) 45(1.32,2) 46(-1.32,2) 47(1.32,2.4) 48(-1.32,2.4) 49(1.32,2.8) 50(-1.32,2.8) 51(1.32,3.2) 52(-1.32,3.2) 53(1.32,3.6) 54(-1.32,3.6) 55(1.32,4) 56(-1.32,4) 57(1.32,4.4) 58(-1.32,4.4) 59(1.32,4.8) 60(-1.32,4.8) 61(1.32,5.2) 62(-1.32,5.2) 63(1.32,5.6) 64(-1.32,5.6) 65(1.32,6) 66(-1.32,6) 67(1.32,6.4) 68(-1.32,6.4) 69(1.32,6.8) 70(-1.32,6.8)
  silkscreen extent -21.7,-23.13 3.3,12.37, body extent -21.79,-23.25 3.29,12.31, height 5.51
INDM2929X140 [mm] "coilcraft inductor lps3015"
  rect 0.635x0.635 smd paste+0 mask+0: 1(-1.27,0) 2(1.27,0)
  Top Layer region: 0.508,-1.524 0.508,-0.889 0.889,-0.508 0.889,0.508 0.508,0.889 0.508,1.524 1.397,1.524 1.651,1.27 1.651,-1.27 1.397,-1.524
  Top Layer region: -1.651,-1.27 -1.397,-1.524 -0.508,-1.524 -0.508,-0.889 -0.889,-0.508 -0.889,0.508 -0.508,0.889 -0.508,1.524 -1.397,1.524 -1.651,1.27
  silkscreen extent -0.33,-1.52 0.33,1.52, body extent -1.47,-1.47 1.47,1.47, height 1.4
LEDM1608X80 [mm] "LED; 1.6x0.8mm"
  rect 0.8x0.8 smd: 1(-0.75,0) 2(0.75,0)
  silkscreen extent -0.15,-0.2 0.15,0.2, body extent -0.8,-0.4 0.8,0.4, height 0.5
MOLEX_0473460001 [mm] "Molex USB Micro B"
  rect 1.38x0.4 smd paste-0.08: 1(2.975,1.3) 2(2.975,0.65) 3(2.975,0) 4(2.975,-0.65) 5(2.975,-1.3)
  rect 1.9x2.35 smd: 6(0.325,-2.925) 6(0.325,2.925)
  rect 1.9x1.15 smd: 6(0.325,-0.825) 6(0.325,0.825)
  rect 2.1x1.45 smd: 6(2.625,-2.475) 6(2.625,2.475)
  silkscreen extent -0.87,-4.38 4,4.38, body extent -1.78,-3.99 3.65,3.99, height 2.72
PLCC160P350X280X190-4 [mm]
  rect 1.4x1.1 smd: 1(-1.5,0.8) 2(-1.5,-0.8) 3(1.5,-0.8) 4(1.5,0.8)
  silkscreen extent -2.22,-1.4 0.5,2.08, body extent -1.75,-1.4 1.75,1.4, height 1.9
QFN40P40X40X80-29 [mm] "TQFN28-EP, T2844+1, MAX8934"
  oval 0.75x0.2 smd: 1(-1.925,1.2) 2(-1.925,0.8) 3(-1.925,0.4) 4(-1.925,0) 5(-1.925,-0.4) 6(-1.925,-0.8) 7(-1.925,-1.2) 15(1.925,-1.2) 16(1.925,-0.8) 17(1.925,-0.4) 18(1.925,0) 19(1.925,0.4) 20(1.925,0.8) 21(1.925,1.2)
  oval 0.2x0.75 smd: 8(-1.2,-1.925) 9(-0.8,-1.925) 10(-0.4,-1.925) 11(0,-1.925) 12(0.4,-1.925) 13(0.8,-1.925) 14(1.2,-1.925) 22(1.2,1.925) 23(0.8,1.925) 24(0.4,1.925) 25(0,1.925) 26(-0.4,1.925) 27(-0.8,1.925) 28(-1.2,1.925)
  rect 2.6x2.6 smd paste-0.4: 29(0,0)
  silkscreen extent -2.97,-2.2 2.2,2.2, body extent -2.05,-2.05 2.05,2.05, height 0.8
QFN50P40X40X80-21 [mm] "FT231XQ"
  oval 0.8x0.25 smd: 1(-2,1) 2(-2,0.5) 3(-2,0) 4(-2,-0.5) 5(-2,-1) 11(2,-1) 12(2,-0.5) 13(2,0) 14(2,0.5) 15(2,1)
  oval 0.25x0.8 smd: 6(-1,-2) 7(-0.5,-2) 8(0,-2) 9(0.5,-2) 10(1,-2) 16(1,2) 17(0.5,2) 18(0,2) 19(-0.5,2) 20(-1,2)
  rect 2x2 smd paste-1: 21(0,0)
  silkscreen extent -3,-2.22 2.23,2.23, body extent -2.07,-2.07 2.08,2.08, height 0.8
QFN50P47X37X100-21 [mm] "VQFN, TXB0108RGYR"
  oval 0.28x0.85 smd paste-0.025 mask+0.07: 1(-0.75,2.225) 10(-0.75,-2.225) 11(0.75,-2.225) 20(0.75,2.225)
  oval 0.85x0.28 smd paste-0.025 mask+0.07: 2(-1.725,1.75) 3(-1.725,1.25) 4(-1.725,0.75) 5(-1.725,0.25) 6(-1.725,-0.25) 7(-1.725,-0.75) 8(-1.725,-1.25) 9(-1.725,-1.75) 12(1.725,-1.75) 13(1.725,-1.25) 14(1.725,-0.75) 15(1.725,-0.25) 16(1.725,0.25) 17(1.725,0.75) 18(1.725,1.25) 19(1.725,1.75)
  rect 0.3x0.3 smd paste-0.15 mask+0: 21(0,0)
  Top Layer region: 0.16,2.65 0.16,1.925 -0.16,1.925 -0.16,2.65 -0.39,2.65 -0.39,1.525 -1.025,1.525 -1.025,-1.525 -0.39,-1.525 -0.39,-2.65 -0.16,-2.65 -0.16,-1.925 0.16,-1.925 0.16,-2.65 0.39,-2.65 0.39,-1.525 1.025,-1.525 1.025,1.525 0.39,1.525 0.39,2.65
  silkscreen extent -1.97,-2.48 1.98,3.25, body extent -1.82,-2.33 1.83,2.32, height 1
RESC1005X35 [mm] "Chip Resistor; 1x0.5mm"
  rect 0.6x0.62 smd: 1(-0.48,0) 2(0.48,0)
  silkscreen extent -0.1,-0.25 0.1,0.25, body extent -0.5,-0.25 0.5,0.25, height 0.35
SON50P210X210X80-9 [mm] "WSON8TP, TPS62162"
  rect 0.5x0.28 smd paste-0.14 mask+0.07: 1(-0.95,0.75) 2(-0.95,0.25) 3(-0.95,-0.25) 4(-0.95,-0.75) 5(0.95,-0.75) 6(0.95,-0.25) 7(0.95,0.25) 8(0.95,0.75)
  rect 0.9x1.6 smd paste-0.45 mask+0.07: 9(0,0)
  silkscreen extent -1.5,-1.2 1.05,1.25, body extent -1.05,-1.05 1.05,1.05, height 0.8
SON50P310X310X100-11 [mm] "VSON10, TPS61202"
  oval 0.85x0.28 smd paste-0.025 mask+0.07: 1(-1.475,1) 2(-1.475,0.5) 3(-1.475,0) 4(-1.475,-0.5) 5(-1.475,-1) 6(1.475,-1) 7(1.475,-0.5) 8(1.475,0) 9(1.475,0.5) 10(1.475,1)
  rect 1.65x2.4 smd paste-0.825 mask+0.07: 11(0,0)
  Top Layer region: -0.39,1.9 -0.11,1.9 -0.11,1.2 -0.39,1.2
  Top Layer region: 0.39,1.2 0.11,1.2 0.11,1.9 0.39,1.9
  Top Layer region: 0.39,-1.9 0.11,-1.9 0.11,-1.2 0.39,-1.2
  Top Layer region: -0.39,-1.2 -0.11,-1.2 -0.11,-1.9 -0.39,-1.9
  silkscreen extent -2.15,-1.7 1.7,1.7, body extent -1.55,-1.55 1.55,1.55, height 1
SOT95P360X130-6 [mm] "3 Pin"
  rect 0.7x1 smd: 1(-0.95,-1.3) 2(0,-1.3) 3(0.95,-1.3) 4(0.95,1.3) 5(0,1.3) 6(-0.95,1.3)
  silkscreen extent -2.05,-2.12 1.63,2.12, body extent -1.46,-1.42 1.46,1.42, height 1.1
SOT190P360X120-3 [mm] "3 Pin"
  rect 1x1.4 smd: 1(-0.95,-1.1) 2(0.95,-1.1) 3(0,1.1)
  silkscreen extent -1.28,-0.05 1.28,1.1, body extent -1.5,-1.25 1.5,1.25, height 1.1
SW_7914J-1-000E [mm] "BOURNS 7914J-001-000"
  rect 1.27x1.78 smd: 1(-1.275,1.9) 1(-1.275,-1.9) 2(1.275,1.9) 2(1.275,-1.9)
  silkscreen extent -2.37,-2.25 2.43,2.25, body extent -2.5,-2.5 2.5,2.5, height 4
TP_THT [mm] "TestPoint, suitable for soldering"
  round 1.5 hole 1: 1(0,0)

## Part data
C1 C3 C5 C7 C9 C12 C60 C61: library part Capacitor, "Capacitor SMD Ceramic X7R"
C2 C6 C50 C51 C52 C53 C100 C101 C110 C111: library part Capacitor, "Capacitor SMD"
C4 C8 C10 C11: library part Capacitor, "Capacitor SMD Ceramic X7R Low ESR"
D1 D40 D50: library part LED_green, "Light Emitting Diode"
D2 D4 D42 D51: library part LED_red, "Light Emitting Diode"
D3: library part LED_blue, "Light Emitting Diode"
D5 D52: library part LED_yellow, "Light Emitting Diode"
D6 D41 D53: library part LED_orange, "Light Emitting Diode"
D20: library part LED_RGB_CA, "RGB LED with common Anode"
D100 D101: library part D_SCHOTTKY, "Schottky Diode"
J1 R5: library part PORT_THT, "2-Pin THT Port"
J2: library part ACCU_PORT, "Accu Port"
J3 J4: library part USB_micro_B, "USB Connectors MICRO USB B RECPT"
JP1: "Jumper"
L1 L2: library part L, "Inductor"
P1: library part "Intel Edison Header", "Intel Edison Header, 70-Pin Dual row"
Q20 Q21 Q22 Q40 Q41 Q42 Q50 Q100: "N-Channel MOSFET"
R1 R2 R3 R4 R6 R7 R8 R9 R20 R21 R30 R31 R32 R33 R40 R41 R42 R43 R50 R51 R52 R53 R54 R55 R60 R61 R62 R100 R106 R107 R108 R109 R110 R111 R112 R113 R114 R115 R116 R117 R118 R119 R120 R121 R122 R123 R124 R125 R130 R131 R132 R140 R141 R142 R143 R144 R145 R150 R151 R152 R153 R200 R201 R202 R203 R204 R205 R206: library part Resistor, "Resistor"
S30 S31 S32 S100: "Switch PB"
TP1 TP2 TP3 TP4 TP5 TP100 TP101 TP102 TP103 TP104 TP105 TP106 TP107 TP108 TP109 TP110 TP111: library part TP1, "Test-Point"
U1: "IC BATTERY CHARGER DUAL 28TQFN"
U2: "IC FUEL/GAS GAUGE LI-ION 1A 6DFN"
U3: "IC REG BUCK 3.3V 1A SYNC 8WSON"
U4: "IC REG BOOST 5V 1.2A SYNC 10SON"
U5: "IC USB SERIAL FULL UART 20QFN"
U6: library part MIC2039, "Adjustable Current Limit Power Switch"
U10 U11: library part TXS0108ERGYR, "8-Bit Bidirectional Voltage-Level Translator"
U50: "MOD IEEE802.15.4-2011 UWB TXRX"

## Free pads (board coordinates)
  round 3.1 hole 3.1 paste+0 mask+0: 0(3,23.8) 0(50.5,3)

## Via types
v1: diameter 0.65, hole 0.15, Top Layer to Bottom Layer, 274 vias
v2: diameter 1, hole 0.5, Top Layer to Bottom Layer, 2 vias
v3: diameter 0.65, hole 0.15, Top Layer to Bottom Layer, tented bottom, 1 vias

## Nets (pads, with @x,y where several pads share a name; then routed paths per layer and width w, separated by ;. In a path a pad name is that pad's centre, name@x,y a point inside that pad or via, vN(x,y) a via of type N, cw(c..) or ccw(c..) an arc to the next point about the centre after c; other vN are vias at no path point)
1V8: C51.2 C100.2 C110.2 P1.12 R32.2 R42.2 R62.1 R100.2 R118.1 R119.1 R130.1 R131.1 R132.1 R203.1 R204.1 R205.1 R206.1 TP3.1 U5.11 U5.20 U10.2 U11.2 | length 62.8
  Top Layer w0.15: P1.12@47.78,19.3 48.4,19.3 48.6,19.1 48.6,17.1 v1(48,16.5) ; R100.2@51.7,31.08 v1(51.7,32)
  Top Layer w0.2: R130.1@16.5,26.98 17.3,26.98 ; v1(17.3,27.9) 17.3,26.98 ; R132.1@19.5,26.98 R131.1@18,26.98 17.3,26.98 ; v1(32.3,19.8) 32.9,20.4 33.52,20.4 R206.1@34.12,21 34.12,20.98 34.7,20.4 35.4,20.4 v1(36.1,19.7) ; v1(32.5,23.3) R204.1@33.22,23.3 ; R203.1@33.32,24.3 R204.1@33.32,23.2 R205.1@33.32,22.1 33.32,22.096 33.7,21.716 33.7,21.413 R206.1@34.113,21
  Top Layer w0.25: v1(35.8,13) 36.42,13 C110.2@37.07,13.65 ; U11.2@35.925,13.65 C110.2@37.07,13.65 ; U10.2@36.125,5.65 C100.2@37.13,5.65 ; C110.2@37.12,13.7 C110.2@37.07,13.65
  Top Layer w0.3: TP3.1@33.385,2.54 34.645,3.8 37.614,3.8 38.1,4.286 38.1,5.1 37.72,5.48 C100.2@37.3,5.48
  Mid-Layer 3 w0.3: TP3.1@33.385,2.54 32.5,3.425 32.5,9.7 v1(35.8,13)
  Bottom Layer w0.15: R32.2@36.7,16.18 R42.2@36.7,17.22
  Bottom Layer w0.2: v1(32.3,19.8) 32.4,19.7 U5.11@32.4,18.9 ; v1(32.5,23.3) 34,21.8 35.9,21.8 36.6,22.5 36.6,23.2 37.2,23.8 38.484,23.8 39.48,24.796 R118.1@39.48,24.8
  Bottom Layer w0.3: v1(35.8,13) 35.8,16.1 ; v1(36.1,19.7) 35,18.6 35,17.3 35.8,16.5 35.8,16.1 ; R32.2@36.62,16.1 35.8,16.1 ; R118.1@39.48,24.8 R119.1@39.48,25.9 ; R119.1@39.5,25.9 R119.1@39.48,25.9 ; R62.1@40.62,25.9 R119.1@39.48,25.9
  other v1: 27.6,15.6
3V3: C8.2 C101.2 C111.2 D5.1 D6.1 D20.2 D40.1 D41.1 D42.1 L1.2 R20.1 R21.1 R31.2 TP4.1 U3.6 U10.19 U11.19 U50.5 U50.6 U50.7 | length 81
  Top Layer w0.3: D40.1@2.6,27.55 D41.1@5.6,27.55 D42.1@8.6,27.55 11.25,27.55 12.2,28.5 D20.2@12.2,29.7 v1(12.2,31.3) 15.4,31.3 16,31.9 16,33.7 16.6,34.3 27.2,34.3 27.6,34.7 35,34.7 36.15,35.85 D6.1@36.3,35.85 D5.1@37.9,35.85 ; U11.19@32.475,13.65 31.57,13.65 C111.2@31.3,13.38 31.374,13.38 32.754,12 v1(32.8,12)
  Mid-Layer 2 w0.3: TP4.1@30.845,2.54 33.105,4.8 34.5,4.8 35.525,5.825 35.525,8.225 36.6,9.3 41.8,9.3 v1(43.1,10.6)
  Mid-Layer 3 w0.3: v1(35.6,27.8) 36.37,27.8 39.5,30.93 39.5,33.5 v1(37.1,35.9)
  Bottom Layer w0.25: 39.8,8 40.7,7.1 42.7,7.1 43.1,7.5 v1(43.1,10.6) 42.55,11.15 U3.6@42.55,11.45
  other v1: 17.8,4.6 18.7,4.6 19.6,4.6 37.1,12.3 37.6,12.3 37.1,12.8 37.6,12.8
5V: C10.2 C61.2 P1.20 TP2.1 U4.2 U4.10 U6.1 | length 39.1
  Top Layer w0.2: v1(44.4,22.3) 45.3,21.4 46.656,21.4 47.156,20.9 P1.20@47.78,20.9
  Mid-Layer 3 w0.2: v1(42.3,6.1) 42.3,10.613 43.387,11.7 43.4,11.7 43.4,12.6 42.175,13.825 42.175,14.735 43.625,16.185 43.625,21.525 v1(44.4,22.3)
  Bottom Layer w0.15: U4.10@38.925,21.8 38.925,23.725 39.3,24.1 39.9,24.1 40.55,24.75 41.228,24.75 41.878,24.1 42.5,24.1 42.7,23.9 42.7,22.7 42.9,22.5 C10.2@43.5,22.5
  Bottom Layer w0.2: TP2.1@35.925,2.54 37.585,4.2 41.5,4.2 42.3,5 v1(42.3,6.1)
  other v1: 44.4,22.8 44.4,23.3 45.1,30 45.7,30
CHG_DONE: P1.64 R118.2 U1.1 | length 37.3
  Top Layer w0.15: P1.64@47.78,29.7 48.9,29.7 v1(49.3,30.1)
  Mid-Layer 2 w0.15: v1(26.5,25.9) 28.3,25.9 33,25.9 33.4,25.5 33.4,23.551 34.951,22 36.8,22 37.1,22.3 37.1,23.2 37.612,23.712 37.988,23.712 38.5,24.224 38.5,24.6 v1(37.7,25.4)
  Mid-Layer 3 w0.15: v1(37.7,25.4) 38.4,26.1 38.4,28.876 40.924,31.4 48,31.4 v1(49.3,30.1)
  Bottom Layer w0.15: v1(26.5,25.9) U1.1@26.5,26.525 ; v1(37.7,25.4) 38.3,24.8 R118.2@38.52,24.8
DCIN: P1.14 Q100.2 R117.1 | length 31.9
  Top Layer w0.15: v1(42.1,27.7) 42.1,26.9 42.3,26.7 Q100.2@43.05,26.7 43.05,27.65 43.62,28.22 R117.1@44.2,28.22 ; v1(45.6,23.3) 45.6,23.8 45.2,24.2 44.3,24.2 43.8,23.7 43.8,19.7 44.4,19.1 46.592,19.1 47.192,19.7 P1.14@47.78,19.7
  Bottom Layer w0.15: v1(42.1,27.7) 42.1,30.4 42.8,31.1 46.951,31.1 47.4,30.651 47.4,26.8 45.6,25 v1(45.6,23.3)
DECA_EXTON: P1.52 U10.1 | length 30.7
  Top Layer w0.15: U10.1@35.15,5.175 35.625,5.175 v1(35.9,4.9) ; v1(46.5,27.1) 46.6,27.1 46.8,27.3 46.9,27.3 P1.52@47.78,27.3
  Mid-Layer 3 w0.15: v1(35.9,4.9) 38.5,4.9 39,5.4 39,9.1 40.8,10.9 40.8,16.679 43.3,19.179 43.3,23.076 45.974,25.75 46.328,25.75 46.689,26.111 46.689,26.911 v1(46.5,27.1)
DECA_IRQ: P1.56 U10.9 | length 27.3
  Top Layer w0.15: U10.9@36.125,9.15 36.975,10 v1(37.8,10) ; v1(46.5,28.7) 47.1,28.1 P1.56@47.78,28.1
  Mid-Layer 3 w0.15: v1(37.8,10) 38.627,10 39.9,11.273 39.9,17.051 42.4,19.551 42.4,23.449 43.7,24.749 43.7,27.524 44.376,28.2 46,28.2 v1(46.5,28.7)
DECA_RSTN: P1.50 U10.4 | length 27.1
  Top Layer w0.15: U10.4@36.125,6.65 38.25,6.65 v1(38.3,6.6) ; v1(46.1,26.3) 46.5,26.3 47.1,26.9 P1.50@47.78,26.9
  Mid-Layer 3 w0.15: v1(38.3,6.6) 38.3,8.824 40.5,11.024 40.5,16.803 43,19.303 43,23.2 v1(46.1,26.3)
DECA_WU: P1.54 U10.3 | length 30.8
  Top Layer w0.15: U10.3@36.125,6.15 37.95,6.15 v1(38.3,5.8) ; v1(46.5,27.9) 46.7,27.7 P1.54@47.78,27.7
  Mid-Layer 3 w0.15: v1(38.3,5.8) 37.7,6.4 37.7,8.649 40.2,11.149 40.2,16.927 42.7,19.427 42.7,23.324 44,24.624 44,27.4 44.5,27.9 v1(46.5,27.9)
DWM_EXTON: U10.20 U50.1 | length 26.4
  Top Layer w0.15: U50.1@11.7,2.805 11.7,1.3 12,1 31.4,1 32.1,1.7 32.1,2.7 33.65,4.25 33.65,4.95 U10.20@33.65,5.175
DWM_IRQ: R200.1 U10.12 U50.22 | length 27.2
  Top Layer w0.15: U50.22@14.2,15.095 14.2,12.6 v1(14.9,11.9) ; v1(31.7,10.8) R200.1@32.62,10.8 ; U10.12@32.675,9.15 R200.1@32.675,10.745
  Mid-Layer 2 w0.15: v1(14.9,11.9) 24.2,11.9 24.9,12.6 26.103,12.6 27.103,11.6 28.1,11.6 28.6,11.1 28.6,9.4 29.05,8.95 31.25,8.95 31.7,9.4 v1(31.7,10.8)
DWM_RSTN: Q50.1 U10.17 | length 12.1
  Top Layer w0.15: v1(26.1,6.7) 26.9,7.5 29.776,7.5 30.626,6.65 U10.17@32.675,6.65
  Bottom Layer w0.15: Q50.1@21.3,6.65 26.05,6.65 v1(26.1,6.7)
DWM_WAKEUP: U10.18 U50.2 | length 24
  Top Layer w0.15: U50.2@13.1,2.805 13.1,1.5 13.3,1.3 26.5,1.3 27,1.8 27,3.5 27.5,4 28.9,4 31.05,6.15 U10.18@32.675,6.15
ENA3V3: P1.48 R32.1 R33.1 U3.3 | length 28.1
  Top Layer w0.15: v1(40,23.5) 42.2,23.5 43.4,24.7 43.4,25.3 43.8,25.7 46.324,25.7 47.124,26.5 P1.48@47.78,26.5
  Mid-Layer 2 w0.15: v1(38.7,14.5) 39.4,13.8 42.7,13.8 v1(43.1,14.2)
  Mid-Layer 3 w0.15: v1(38.7,14.5) 37.6,15.6 37.6,21.051 40,23.451 v1(40,23.5)
  Bottom Layer w0.15: R32.1@36.7,15.22 R33.1@37.8,15.22 38.52,14.5 v1(38.7,14.5) ; U3.3@42.55,13.35 42.55,13.65 v1(43.1,14.2)
ENA5V: P1.42 R42.1 R43.1 U4.6 | length 16.6
  Top Layer w0.15: v1(39.1,19.1) 39.1,21.6 39.6,22.1 41.224,22.1 43.7,24.576 43.7,25.1 43.9,25.3 P1.42@47.78,25.3
  Bottom Layer w0.15: R42.1@36.7,18.18 R43.1@37.8,18.18 38.18,18.18 v1(39.1,19.1) 39.1,19.625 U4.6@38.925,19.8 U4.6@38.9,19.775
GAUGE_AL_CC: P1.70 R119.2 U2.5 | length 18.1
  Top Layer w0.15: P1.70@47.78,30.9 47.78,31.88 v1(48.3,32.4)
  Mid-Layer 3 w0.15: v1(37.7,26.3) 38.1,26.7 38.1,29 40.8,31.7 47.6,31.7 v1(48.3,32.4)
  Bottom Layer w0.15: U2.5@36.825,26.3 v1(37.7,26.3) 38.1,25.9 R119.2@38.52,25.9
GND: C1.1 C2.1 C3.1 C4.1 C5.1 C6.1 C7.1 C8.1 C9.1 C10.1 C11.1 C12.1 C50.1 C51.1 C52.1 C53.1 C60.1 C61.1 C100.1 C101.1 C110.1 C111.1 D3.2 D50.2 D51.2 D52.2 D53.2 J1.2 J2.2 J3.5 J3.6 J4.5 J4.6 P1.1 P1.5 P1.9 P1.11 P1.13 P1.15 Q20.2 Q21.2 Q22.2 Q40.2 Q41.2 Q42.2 Q50.2 R1.2 R2.2 R3.1 R5.2 R6.2 R33.2 R41.1 R43.2 R60.2 R61.2 R123.2 R124.2 R125.2 R143.2 R144.2 R145.2 R200.2 R201.2 R202.2 S30.1 S31.1 S32.1 S100.2 TP5.1 U1.4 U1.9 U1.12 U1.13 U1.29 U2.2 U3.1 U3.4 U3.5 U3.9 U4.4 U4.9 U4.11 U5.3 U5.13 U5.21 U6.2 U10.11 U10.21 U11.11 U11.21 U50.8 U50.16 U50.21 U50.23 U50.24 | length 84.7
  Top Layer w0.25: D51.2@20.95,18.2 21.75,19 23.65,19 D50.2@24.45,18.2 25.375,19.125 S32.1@25.375,20.4 ; TP5.1@28.305,2.54 30.285,4.52 C101.1@31.5,4.52 ; v1(31.3,11.6) C111.1@31.3,12.42 ; 33.45,16.15 U11.11@33.45,17.625 33.45,18.45 33.8,18.8 R202.2@35.02,18.8 ; v1@33.65,8.4 U10.11@33.65,9.625 R200.2@33.65,10.73 ; R200.2@33.72,10.8 R201.2@35.22,10.8 ; 34.6,5.7 34.6,4.6 34.9,4.3 37.08,4.3 C100.1@37.3,4.52 ; C110.1@38.08,13.7 40.6,13.7 v1(41.9,12.4) ; D3.2@45.85,31.8 45.85,32.75 v1(46.1,33)
  Bottom Layer w0.2: U1.4@26.575,27.8 U1.29@28.5,27.8 ; C2.1@27.48,30.8 27.48,30.42 27.7,30.2 U1.9@27.7,29.725 U1.29@27.7,28.6 ; U1.29@28.9,28.2 U1.12@28.9,29.725 ; U1.29@29.3,28.6 U1.13@29.3,29.725
  Bottom Layer w0.25: R143.2@12.12,20.3 11.65,20.77 Q40.2@11.65,21.7 11.65,21.95 12.5,22.8 16,22.8 ; Q20.2@12.25,9.2 12.25,8.27 R123.2@12.72,7.8 ; R144.2@15.62,20.3 15.15,20.77 Q41.2@15.15,21.7 15.15,21.95 16,22.8 ; Q21.2@15.75,9.2 15.75,8.27 R124.2@16.22,7.8 ; v1(18.1,22.9) 18,22.8 16,22.8 ; Q42.2@18.65,21.7 18.65,20.77 R145.2@19.12,20.3 ; C12.1@19.1,30.46 R6.2@20.2,30.46 R3.1@21.3,30.46 21.85,30.46 ; Q22.2@19.251,9.199 19.251,8.269 R125.2@19.72,7.8 ; v1(21.5,3.5) Q50.2@21.5,4.55 ; 21.8,35.4 21.85,35.35 21.85,30.46 ; R1.2@23.5,30.46 R2.2@22.4,30.46 21.85,30.46 ; C51.1@26.7,16.88 26.7,17.349 27.251,17.9 U5.3@28.4,17.9 U5.21@30.4,17.9 U5.13@32.4,17.9 C50.1@33.68,17.9 ; C52.1@32.32,21.1 v1(33.2,21.1) ; R41.1@37.2,22.18 37.4,22.18 38.28,21.3 U4.9@38.925,21.3 U4.11@39.9,21.3 ; v1(40.4,20.8) 40.4,22.88 C11.1@40.92,23.4 ; U4.11@40.9,20.3 U4.4@41.875,20.3 ; U3.5@43.05,11.45 43.05,11.85 42.5,12.4 43.05,12.95 U3.4@43.05,13.35
  Bottom Layer w0.4: C4.1@32.98,30.4 J3.6@32.98,32.88
  other v1: 33.9,6.4 34.9,6.4 15.7,6.9 16.4,6.9 33.9,7.4 34.9,7.4 33.9,8.4 34.9,8.4 42.7,12.4 17.6,12.9 20.9,13.7 33.7,14.4 34.7,14.4 33.7,15.4 34.7,15.4 33.7,16.4 34.7,16.4 30.4,17.3 29.8,17.9 31,17.9 30.4,18.5 49.475,19.1 49.7,19.5 39.95,20.05 40.85,20.05 39.95,21.55 40.85,21.55 18.7,22.9 26.6,23.3 27.3,23.3 32.2,26.6 33,26.6 44.6,26.7 45.1,26.7 27.75,27.05 29.25,27.05 27.75,28.55 29.25,28.55 33.1,33 33.8,33 45.4,33 28.2,33.1 28.9,33.1 40.5,33.1 41.2,33.1 33.1,33.7 33.8,33.7 28.2,33.8 28.9,33.8 40.5,34.3 41.2,34.3 45.4,34.3 46.1,34.3 27.4,35.5 28.8,35.5 30.2,35.5 31.8,35.5 33.2,35.5 34.5,35.5 39.7,35.5 41.1,35.5 42.5,35.5 44.1,35.5 45.5,35.5 46.8,35.5 27.4,36.7 28.8,36.7 30.2,36.7 31.8,36.7 33.2,36.7 34.5,36.7 39.7,36.7 41.1,36.7 42.5,36.7 44.1,36.7 45.5,36.7 46.8,36.7
GPIO83: P1.68 U11.1 | length 37.6
  Top Layer w0.15: U11.1@34.95,13.175 34.95,12.35 35.6,11.7 44.7,11.7 45.4,12.4 45.4,15.751 45.749,16.1 46.4,16.1 46.6,16.3 v1(46.6,16.7) ; P1.68@47.78,30.5 48.9,30.5 49.3,30.9 v1(49.3,32.4)
  Mid-Layer 3 w0.15: v1(46.6,16.7) 46.6,17.3 50,20.7 50,31.7 v1(49.3,32.4)
GPIO84: P1.44 U11.3 | length 26.3
  Top Layer w0.15: U11.3@35.925,14.15 36.5,14.15 36.7,14.35 37.399,14.35 38.149,15.1 44.324,15.1 45.8,16.576 v1(45.8,16.7) ; P1.44@47.78,25.7 48.424,25.7 48.9,26.176 48.9,27.2 v1(49.3,27.6)
  Mid-Layer 3 w0.15: v1(45.8,16.7) 45.8,17 48.1,19.3 48.1,26.4 v1(49.3,27.6)
I2C1_SCL: P1.41 R203.2 U11.6 | length 29.6
  Top Layer w0.15: R203.2@34.28,24.3 34.68,24.7 v1(35.7,24.7) 37.2,23.2 37.2,22.202 37.65,21.752 37.65,16.95 36.35,15.65 U11.6@35.925,15.65 ; v1(49.3,24.9) 49.4,24.9 49.8,25.3 P1.41@50.42,25.3
  Mid-Layer 2 w0.15: v1(35.7,24.7) 35.7,25.1 37.6,27 37.951,27 38.801,26.15 42.677,26.15 44.027,24.8 49.2,24.8 v1(49.3,24.9)
  Mid-Layer 3 w0.15: v1@49.2,24.8 v1(49.3,24.9)
I2C1_SDA: P1.43 R204.2 U11.7 | length 31.9
  Top Layer w0.15: R204.2@34.28,23.2 35.08,24 v1(35.2,24) 35.976,24 36.9,23.076 36.9,22.078 37.35,21.628 37.35,17.15 36.35,16.15 U11.7@35.925,16.15 ; v1(49.4,25.7) P1.43@50.42,25.7
  Mid-Layer 2 w0.15: v1(35.2,24) 34.3,24.9 34.3,26.6 34.7,27 37.176,27 37.476,27.3 38.076,27.3 38.926,26.45 42.801,26.45 44.151,25.1 48.722,25.1 49.322,25.7 v1(49.4,25.7)
  Mid-Layer 3 w0.15: v1@49.3,25.7 v1(49.4,25.7)
I2C6_SCL: P1.45 R205.2 U11.8 | length 35.9
  Top Layer w0.15: R205.2@34.28,22.1 35.2,23.02 v1(35.2,23.2) 36.3,23.2 36.6,22.9 36.6,21.954 37.05,21.504 37.05,17.35 36.35,16.65 U11.8@35.925,16.65 ; P1.45@50.42,26.1 51.1,26.1 v1(51.5,25.7)
  Mid-Layer 2 w0.15: v1(35.2,23.2) 34.6,23.2 34,23.8 34,26.978 35.372,28.35 36.65,28.35 37.4,27.6 38.2,27.6 39.05,26.75 42.926,26.75 44.276,25.4 48.1,25.4 49,26.3 50.9,26.3 v1(51.5,25.7)
I2C6_SDA: P1.47 R206.2 U11.9 | length 35.6
  Top Layer w0.15: R206.2@35.08,21 35.08,22.38 35.35,22.65 v1(35.85,22.65) 35.85,22.279 36.75,21.379 36.75,17.975 U11.9@35.925,17.15 ; P1.47@50.42,26.5 v1(51.5,26.5)
  Mid-Layer 2 w0.15: v1(35.85,22.65) 34.726,22.65 33.7,23.676 33.7,27.102 35.248,28.65 36.774,28.65 37.524,27.9 38.324,27.9 39.174,27.05 43.05,27.05 44.4,25.7 47.976,25.7 48.876,26.6 51.4,26.6 v1(51.5,26.5)
I2C_GAUGE.SCL: R20.2 R110.2 R112.2 U2.3 | length 3.9
  Bottom Layer w0.15: U2.3@34.02,26.845 R20.2@34.02,28.1 34.02,28.24 R110.2@35,29.22 R112.2@36.1,29.22
I2C_GAUGE.SDA: R21.2 R111.2 R113.2 U2.4 | length 3.7
  Bottom Layer w0.15: U2.4@36.825,26.8 36.825,27.745 R21.2@37.18,28.1 37.2,28.12 R111.2@37.2,29.22 R113.2@38.3,29.22
NetC2_2: C2.2 U1.5 U1.6 U1.8 | length 4.9
  Bottom Layer w0.2: U1.5@26.575,28.2 U1.6@26.575,28.6 26.1,28.6 25.8,28.9 25.8,30.08 C2.2@26.52,30.8 26.52,30.593 27.3,29.813 U1.8@27.3,29.725
NetC3_2: C3.2 JP1.1 U1.23 U1.24
  other v1: 28.3,23.3 29.1,23.3 29.9,23.3
NetC11_2: C11.2 U4.1 U4.7 | length 11.3
  Top Layer w0.15: v1(38.2,19.3) 38.8,19.9 38.8,23.4 39.6,24.2 v1(41,24.2)
  Bottom Layer w0.15: v1(38.2,19.3) 38.2,20.1 38.4,20.3 U4.7@38.925,20.3 ; v1(41,24.2) 41.08,24.2 C11.2@41.88,23.4
  Bottom Layer w0.25: U4.1@41.88,21.805 C11.2@41.88,23.4
NetC12_2: C12.2 U1.10 | length 13.7
  Mid-Layer 2 w0.15: v1(18.2,30.5) 19.2,31.5 26.6,31.5 v1(27.1,32)
  Bottom Layer w0.15: v1(18.2,30.5) 18.2,30.4 C12.2@19.1,29.5 ; v1(27.1,32) 27.7,31.4 27.9,31.4 28.1,31.2 U1.10@28.1,29.725
NetC52_2: C52.2 J3.2 R50.1 | length 13.6
  Top Layer w0.15: v1(30.2,32) 30.5,31.7 30.5,31 31.2,30.3 31.2,23.5 v1(31.8,22.9)
  Bottom Layer w0.15: v1(30.2,32) 30.35,32.15 J3.2@30.35,33.325 ; v1(31.8,22.9) 31.4,22.9 31.2,22.7 R50.1@31.2,22.08 C52.2@32.3,22.08
NetC53_2: C53.2 J3.3 R51.1 | length 13.5
  Top Layer w0.15: v1(31.1,32) 30.8,31.7 30.8,31.124 31.5,30.424 31.5,24.08 v1(31.8,23.78)
  Bottom Layer w0.15: C53.2@29.08,22 R51.1@30.02,22 ; R51.1@30.1,22.08 v1(31.8,23.78) ; J3.3@31,33.325 31,32.1 v1(31.1,32)
NetC60_2: C60.2 J4.1 U6.6
NetD1_2: D1.2 R7.1 | length 2.7
  Top Layer w0.15: D1.2@31.75,33.6 31.75,32.65 32.4,32 R7.1@33.22,32
NetD2_2: D2.2 R8.2 | length 1.3
  Top Layer w0.15: R8.2@32.32,27.5 D2.2@32.32,28.77
NetD3_1: D3.1 R9.2 | length 1.2
  Top Layer w0.15: R9.2@43.18,31.8 D3.1@44.35,31.8
NetD4_2: D4.2 R30.1 | length 1
  Bottom Layer w0.15: R30.1@38.9,16.38 D4.2@39.87,16.38
NetD5_2: D5.2 R54.1 | length 1
  Top Layer w0.15: R54.1@37.7,33.18 D5.2@37.7,34.15
NetD6_2: D6.2 R55.2 | length 1
  Top Layer w0.15: R55.2@36.5,33.18 D6.2@36.5,34.15
NetD20_1: D20.1 R120.2 | length 22.6
  Top Layer w0.15: D20.1@13.8,29.7 13.8,28.6 v1(14.4,28)
  Mid-Layer 2 w0.15: v1(11.4,12.9) 12.238,13.738 12.238,17.314 11.2,18.351 11.2,19.724 11.2,19.9 11.2,28.024 12.076,28.9 13.5,28.9 v1(14.4,28)
  Bottom Layer w0.15: v1(11.4,12.9) R120.2@12.22,12.9
NetD20_3: D20.3 R122.2 | length 23.1
  Top Layer w0.15: D20.3@12.2,26.7 12.2,27.5 v1(12.7,28)
  Mid-Layer 2 w0.15: v1(12.7,28) 12.024,28 11.8,27.776 11.8,18.6 12.838,17.562 12.838,14.686 14.024,13.5 17.8,13.5 v1(18.4,12.9)
  Bottom Layer w0.15: v1(18.4,12.9) R122.2@19.22,12.9
NetD20_4: D20.4 R121.2 | length 21.2
  Top Layer w0.15: D20.4@13.5,27 v1(13.5,28)
  Mid-Layer 2 w0.15: v1(13.5,28) 12.9,28.6 12.2,28.6 11.5,27.9 11.5,18.476 12.538,17.438 12.538,14.562 14.2,12.9 v1(14.9,12.9)
  Bottom Layer w0.15: v1(14.9,12.9) R121.2@15.72,12.9
NetD40_2: D40.2 R140.1 | length 1.6
  Top Layer w0.15: D40.2@2.6,29.05 3.43,29.88 R140.1@3.9,29.88
NetD41_2: D41.2 R141.1 | length 1.6
  Top Layer w0.15: D41.2@5.6,29.05 6.43,29.88 R141.1@6.9,29.88